# EAGLE board SparkFun_ProMicro-RP2040-Panel (EAGLE 9.6.2), part 1 of 9
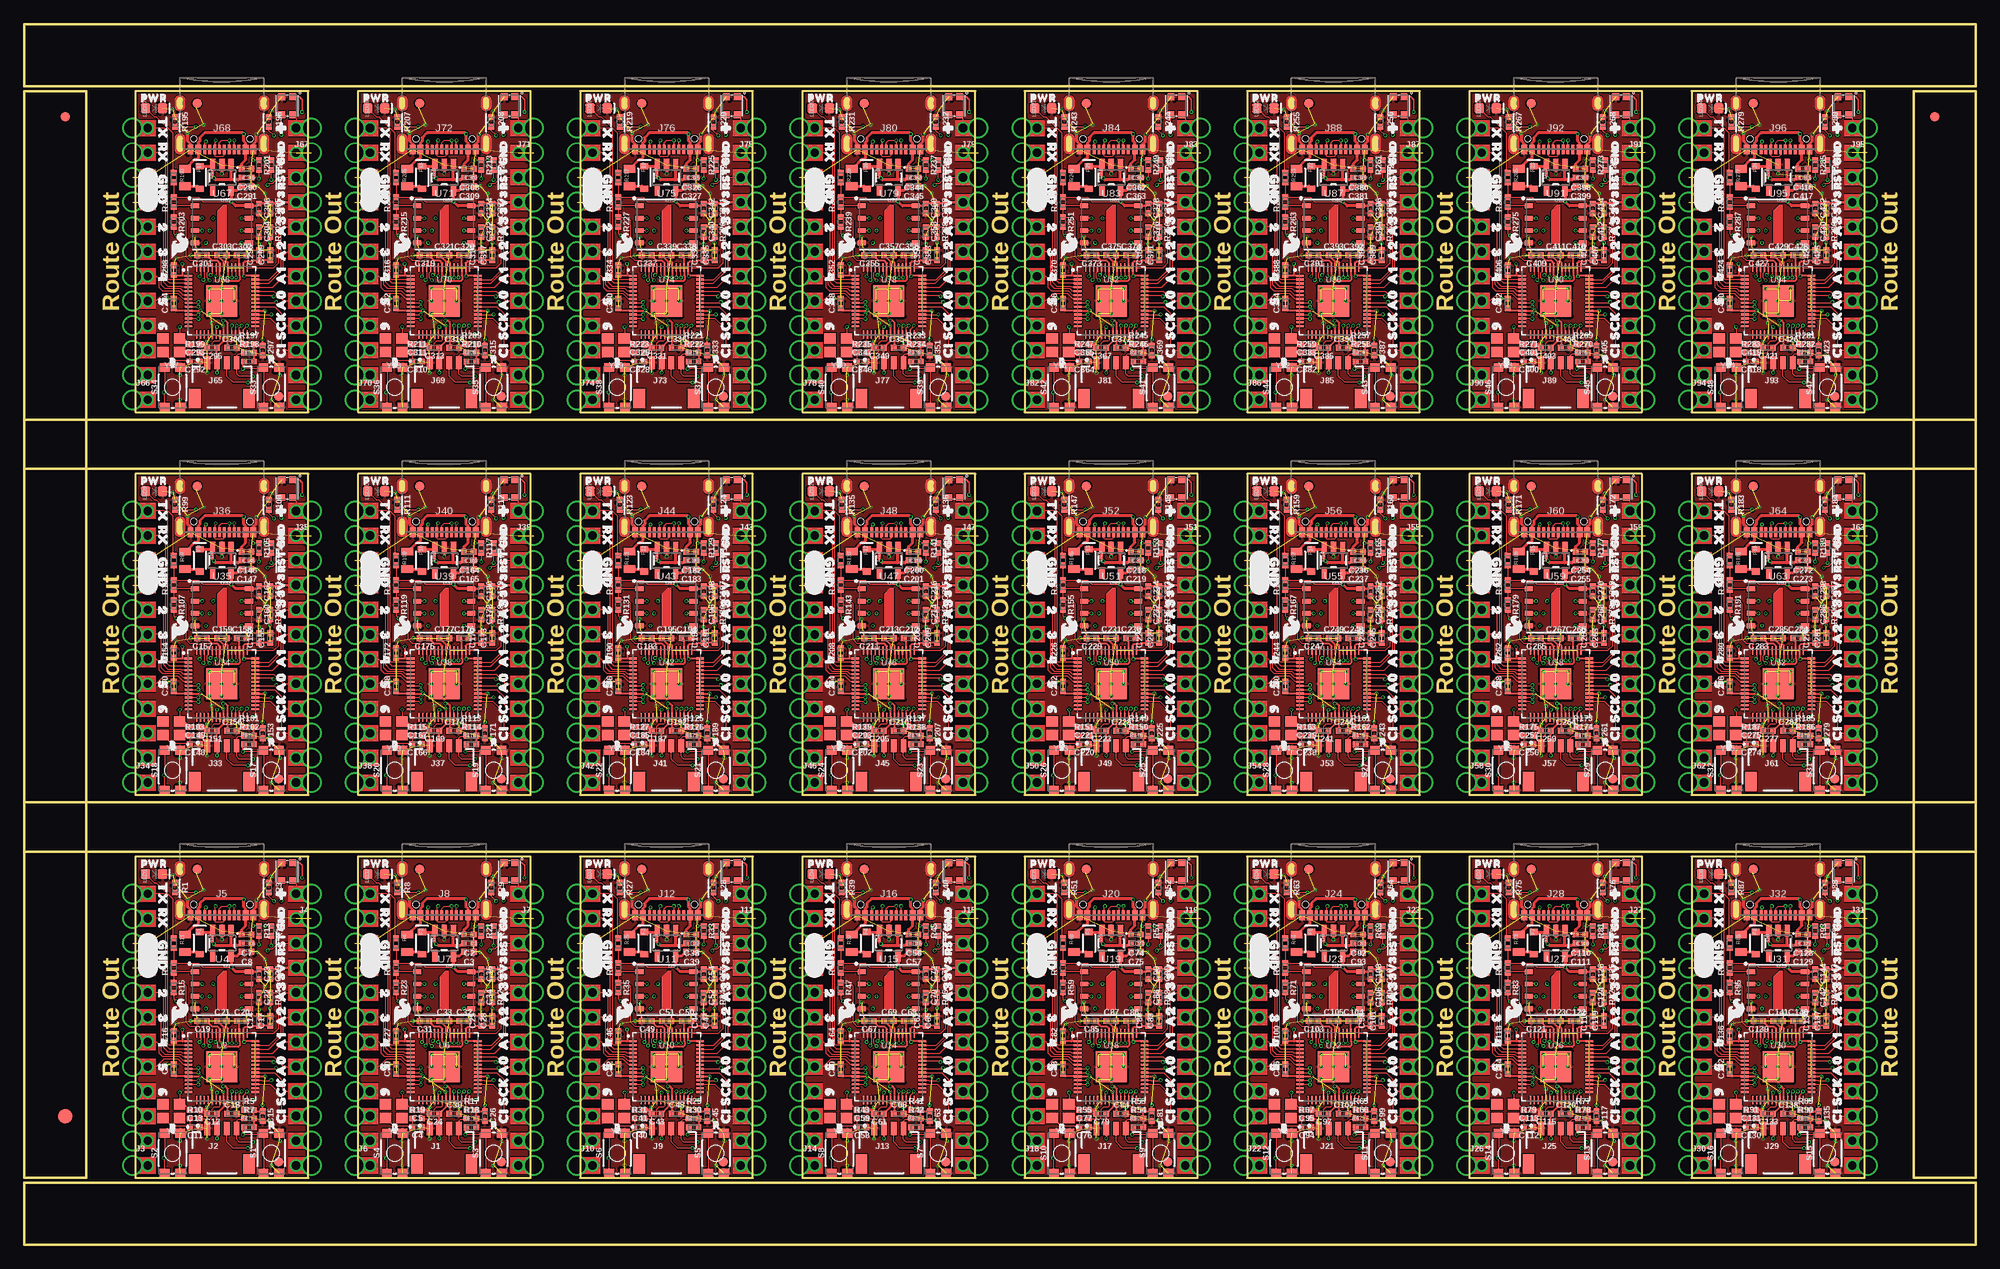
[diagram p0: board, top side]
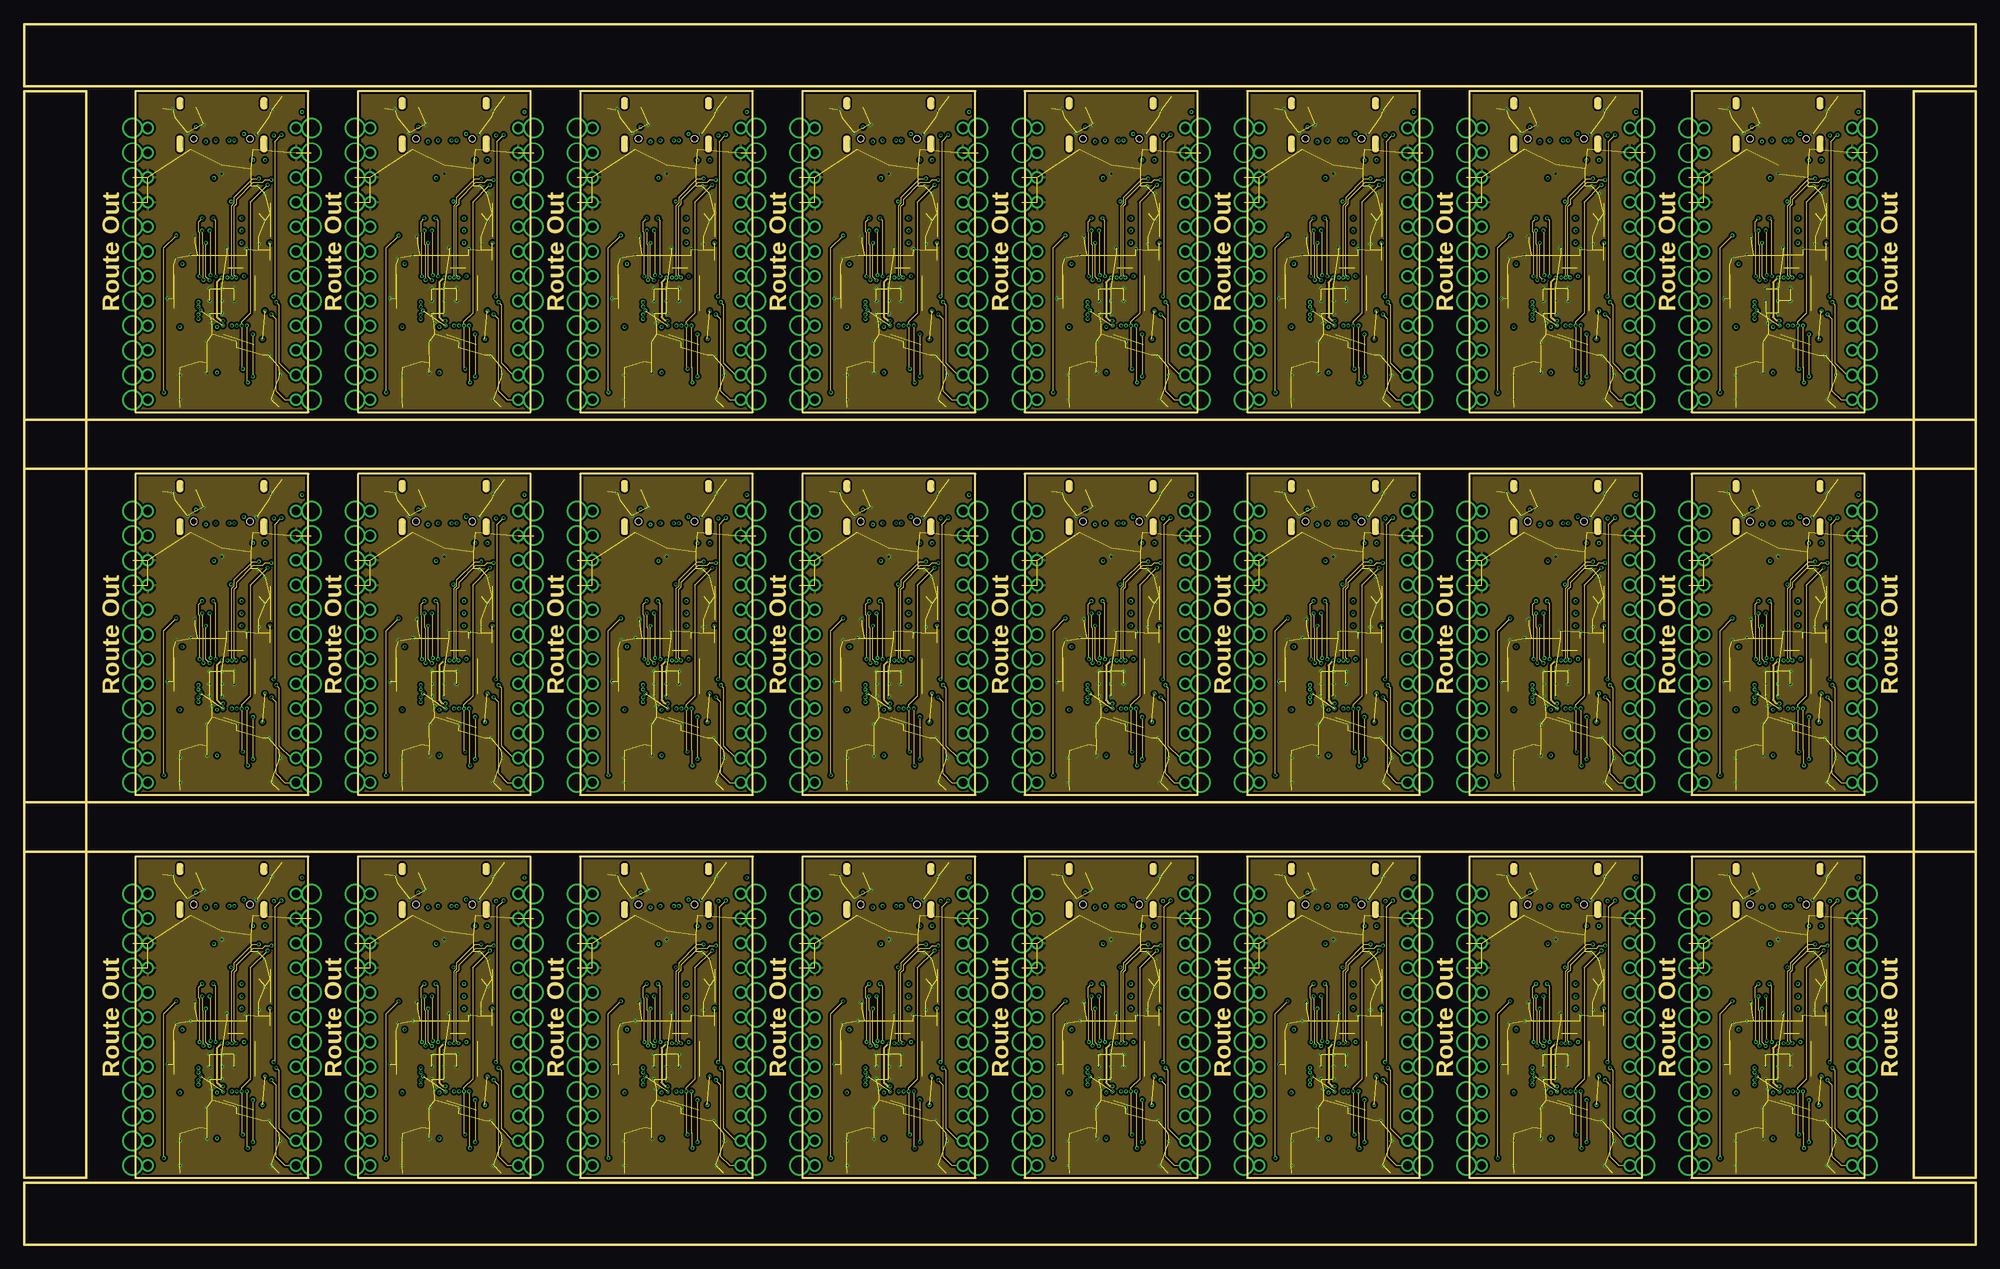
[diagram p1: board, inner layer Route2]
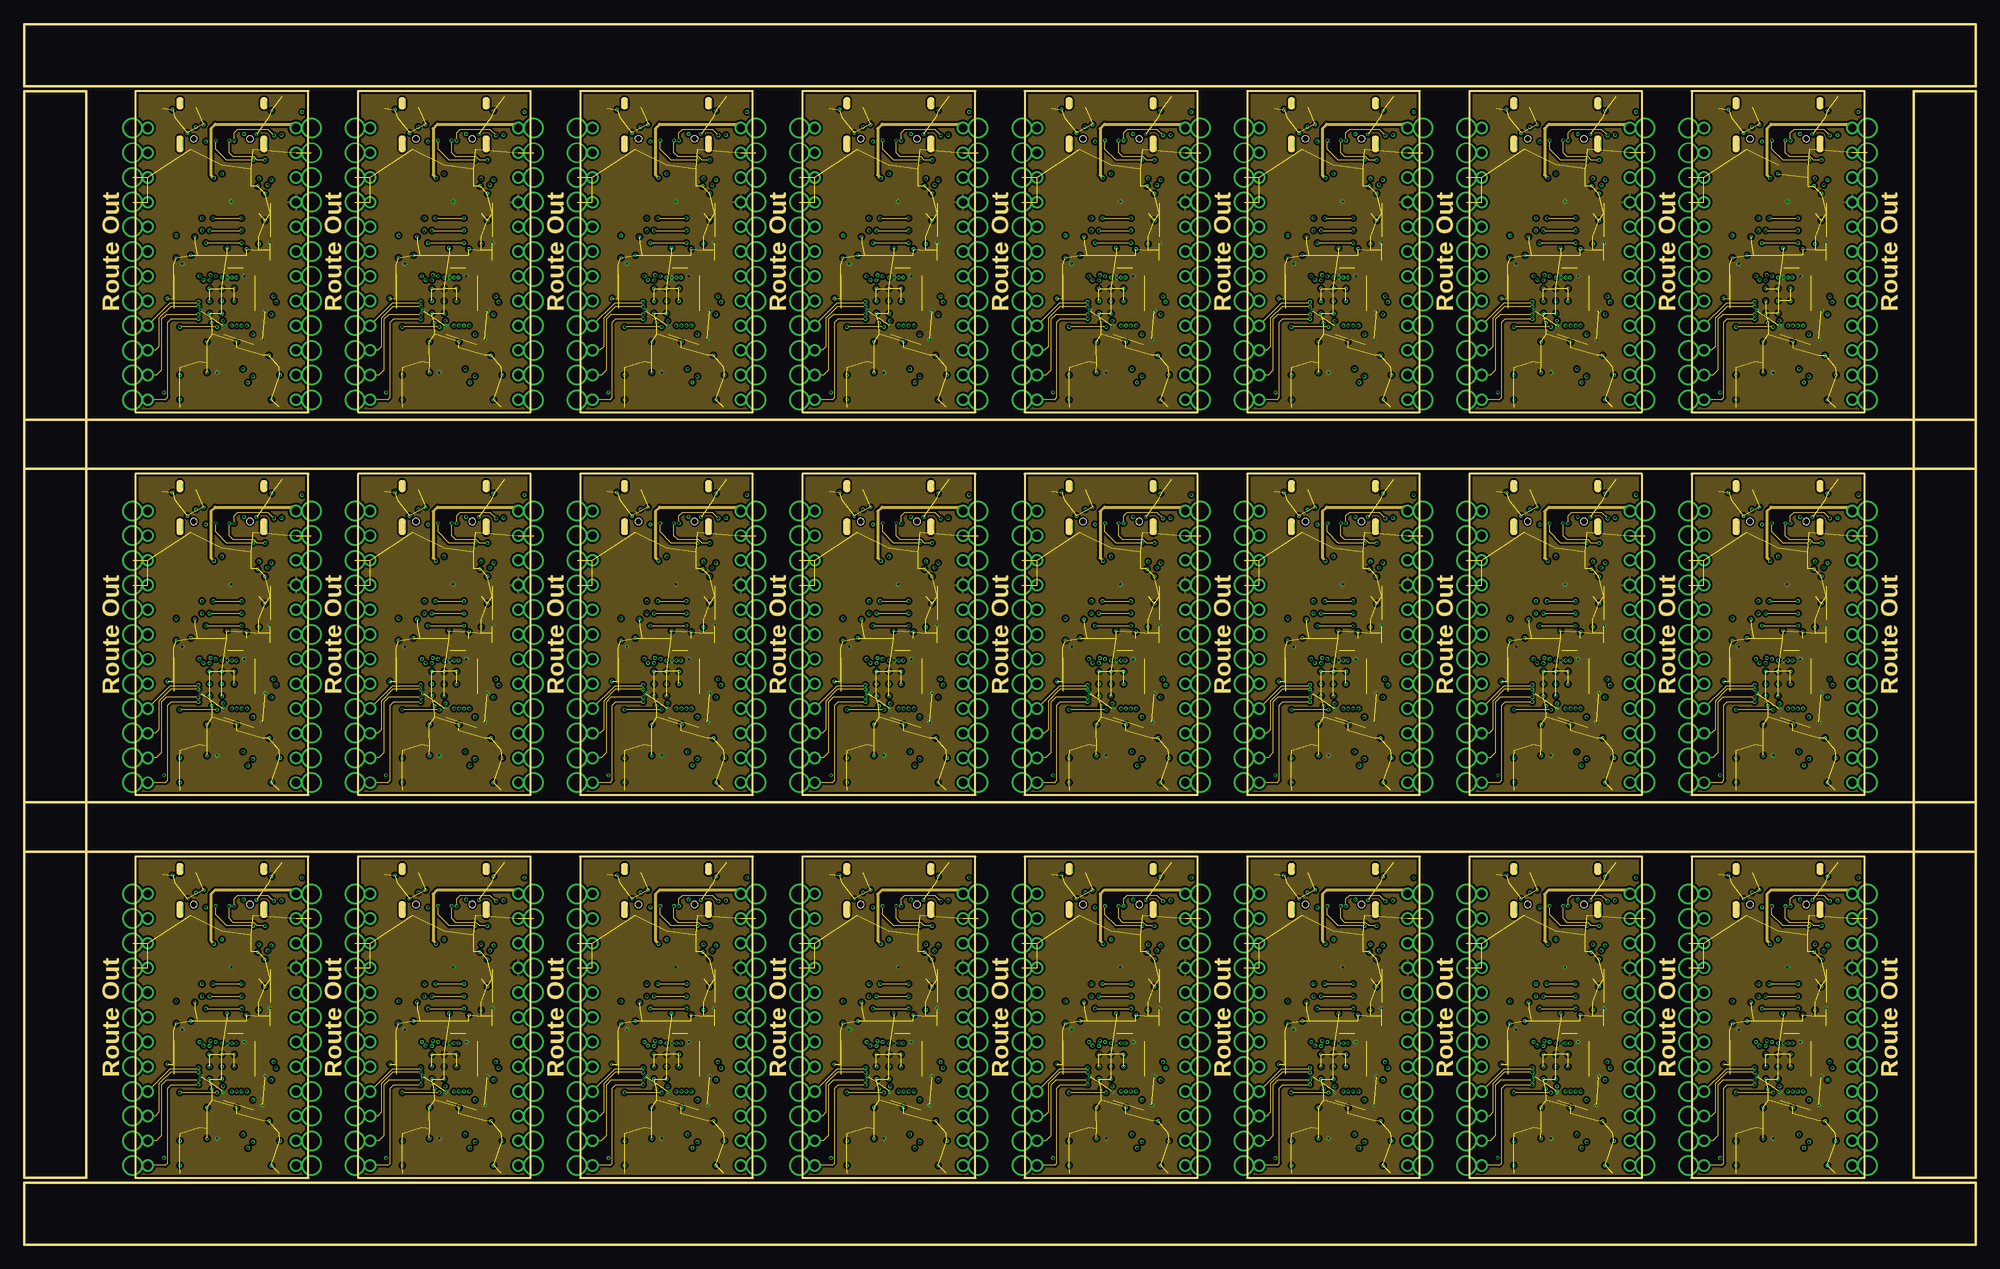
[diagram p2: board, inner layer Route15]
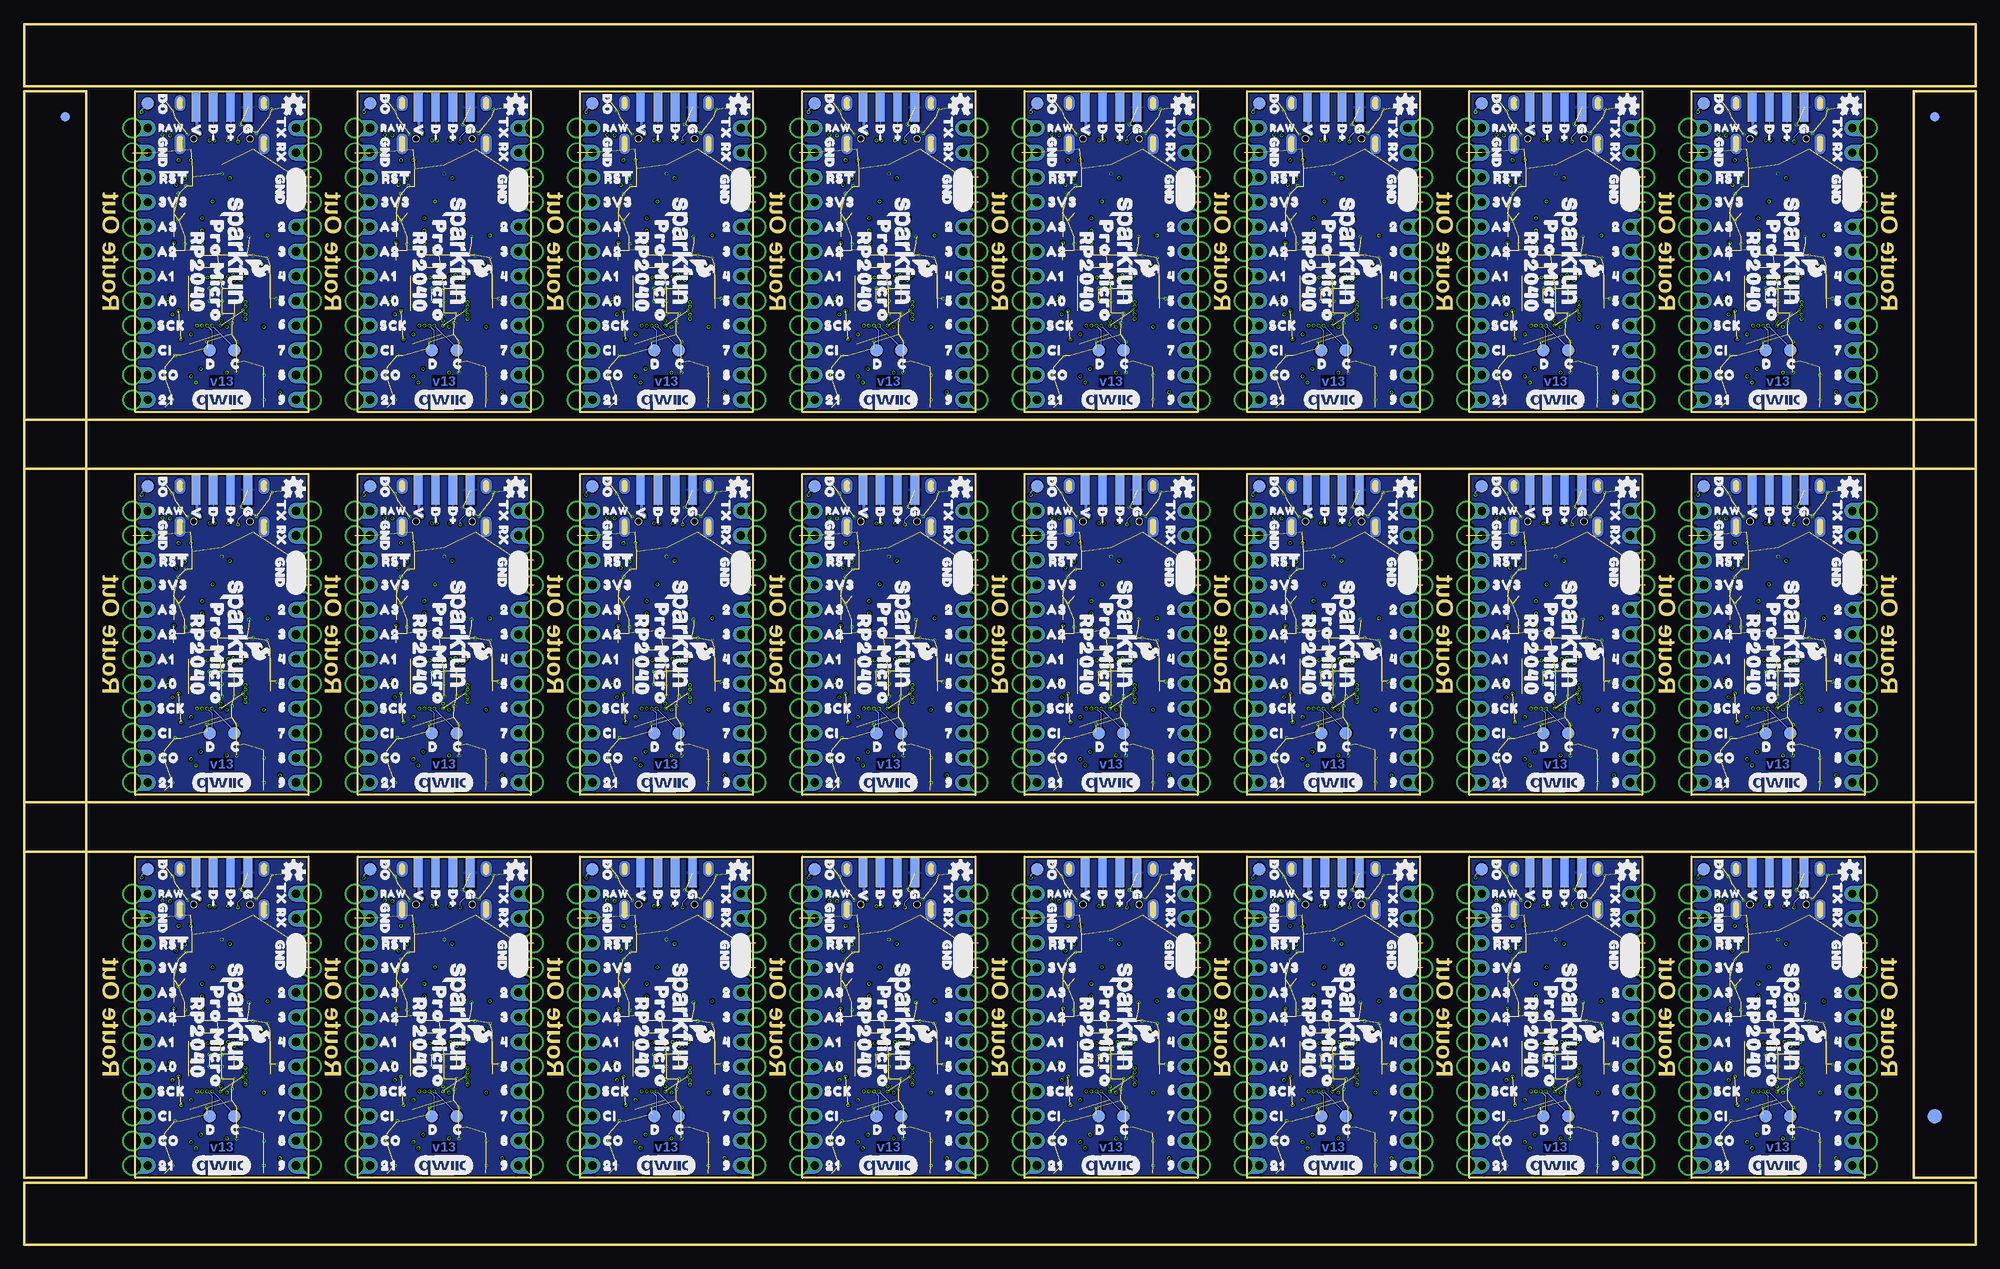
[diagram p3: board, bottom side, seen from below]

Size 200.66 x 125.48 mm. Coordinates in mm from the lower left corner, seen from the top.
Outline: 200.66,84.84 200.66,118.62 194.31,118.62 194.31,6.86 200.66,6.86 200.66,40.39
Outline: 200.66,84.84 200.66,79.76
Outline: 200.66,79.76 200.66,45.47
Outline: 200.66,45.47 200.66,40.39
Outline: 0,40.39 0,6.86 6.35,6.86 6.35,118.62 0,118.62 0,84.84
Outline: 0,40.39 0,45.47
Outline: 0,45.47 0,79.76
Outline: 0,79.76 0,84.84
Outline: 0,84.84 200.66,84.84
Outline: 200.66,79.76 0,79.76
Outline: 0,45.47 200.66,45.47
Outline: 200.66,40.39 0,40.39
Outline: 11.43,39.88 11.43,6.86 29.21,6.86 29.21,39.88 11.43,39.88
Outline: 34.29,39.88 34.29,6.86 52.07,6.86 52.07,39.88 34.29,39.88
Outline: 57.15,39.88 57.15,6.86 74.93,6.86 74.93,39.88 57.15,39.88
Outline: 80.01,39.88 80.01,6.86 97.79,6.86 97.79,39.88 80.01,39.88
Outline: 102.87,39.88 102.87,6.86 120.65,6.86 120.65,39.88 102.87,39.88
Outline: 125.73,39.88 125.73,6.86 143.51,6.86 143.51,39.88 125.73,39.88
Outline: 148.59,39.88 148.59,6.86 166.37,6.86 166.37,39.88 148.59,39.88
Outline: 171.45,39.88 171.45,6.86 189.23,6.86 189.23,39.88 171.45,39.88
Outline: 11.43,79.25 11.43,46.23 29.21,46.23 29.21,79.25 11.43,79.25
Outline: 34.29,79.25 34.29,46.23 52.07,46.23 52.07,79.25 34.29,79.25
Outline: 57.15,79.25 57.15,46.23 74.93,46.23 74.93,79.25 57.15,79.25
Outline: 80.01,79.25 80.01,46.23 97.79,46.23 97.79,79.25 80.01,79.25
Outline: 102.87,79.25 102.87,46.23 120.65,46.23 120.65,79.25 102.87,79.25
Outline: 125.73,79.25 125.73,46.23 143.51,46.23 143.51,79.25 125.73,79.25
Outline: 148.59,79.25 148.59,46.23 166.37,46.23 166.37,79.25 148.59,79.25
Outline: 171.45,79.25 171.45,46.23 189.23,46.23 189.23,79.25 171.45,79.25
Outline: 11.43,118.62 11.43,85.6 29.21,85.6 29.21,118.62 11.43,118.62
Outline: 34.29,118.62 34.29,85.6 52.07,85.6 52.07,118.62 34.29,118.62
Outline: 57.15,118.62 57.15,85.6 74.93,85.6 74.93,118.62 57.15,118.62
Outline: 80.01,118.62 80.01,85.6 97.79,85.6 97.79,118.62 80.01,118.62
Outline: 102.87,118.62 102.87,85.6 120.65,85.6 120.65,118.62 102.87,118.62
Outline: 125.73,118.62 125.73,85.6 143.51,85.6 143.51,118.62 125.73,118.62
Outline: 148.59,118.62 148.59,85.6 166.37,85.6 166.37,118.62 148.59,118.62
Outline: 171.45,118.62 171.45,85.6 189.23,85.6 189.23,118.62 171.45,118.62
Outline: 0,6.35 200.66,6.35 200.66,0 0,0 0,6.35
Outline: 0,125.48 200.66,125.48 200.66,119.13 0,119.13 0,125.48
Copper layers (1+2*15+16): Top 0.035mm / dielectric 1.5mm / Route2 0.035mm / dielectric 0.15mm / Route15 0.035mm / dielectric 0.2mm / Bottom 0.035mm
Design rules "SparkFun_ProMicro-RP2040": minimum track width 4mil, minimum drill 0.2mm, track to track 4mil, track to pad 4mil, pad to pad 4mil, via to via 4mil, smd to smd 4mil, copper to edge 6mil, drill to drill 6mil, minimum pad ring 3mil, minimum via ring 3mil, stop-mask expansion 4mil, vias tented up to drill 25mil, thermal gap 10mil
Net classes: 1 Power: width 0.127 mm, clearance 0.178 mm

## Footprints (pad centres in the part's own frame; a part is rotated, then mirrored left to right if it is on the bottom)
0402-TIGHT = smd 0.6 x 0.6: 1 -0.5,0; 2 0.5,0
SOD-323 = smd 0.63 x 0.83: A 1.15,0; C -1.15,0
FIDUCIAL-1X2 = smd 1 x 1: 1 0,0
FIDUCIAL-1.5X3 = smd 1.5 x 1.5: 1 0,0
0805 = smd 0.8 x 1.2: 1 -0.9,0; 2 0.9,0
JST04_1MM_RA = smd 0.6 x 1.35: 1 -1.5,0; 2 -0.5,0; 3 0.5,0; 4 1.5,0 | smd 1.2 x 2: NC1 2.8,-3.675; NC2 -2.8,-3.675
1X12_CASTELLATED = drill 0.85 pad 1.016: 1 0,0; 2 0,2.54; 3 0,5.08; 4 0,7.62; 5 0,10.16; 6 0,12.7; 7 0,15.24; 8 0,17.78; 9 0,20.32; 10 0,22.86; 11 0,25.4; 12 0,27.94 | drill 1.7 pad 1.75: 1B -1.57,0; 2B -1.57,2.54; 3B -1.57,5.08; 4B -1.57,7.62; 5B -1.57,10.16; 6B -1.57,12.7; 7B -1.57,15.24; 8B -1.57,17.78; 9B -1.57,20.32; 10B -1.57,22.86; 11B -1.57,25.4; 12B -1.57,27.94
USB-C-16P_4LAYER-PADS = smd 0.3 x 1: A5 -1.25,-0.34; A6 -0.25,-0.34; A7 0.25,-0.34; A8 1.25,-0.34; B5 1.75,-0.34; B6 0.75,-0.34; B7 -0.75,-0.34; B8 -1.75,-0.34 | smd 0.6 x 1: GND -3.225,-0.34; GND2 3.225,-0.34; VBUS1 -2.45,-0.34; VBUS2 2.45,-0.34 | drill 0.4 pad 0.6 long: SHLD1 -4.318,-0.915; SHLD2 4.318,-0.915; SHLD3 -4.318,-5.095; SHLD4 4.318,-5.095 | hole 0.65: -2.89,-1.445; 2.89,-1.445
USB-SOLDER-PADS = smd 3 x 0.9: D+ 0,-0.889; D- 0,0.889; GND 0,-2.667; VBUS 0,2.667
LED-0603 = smd 1 x 1: A -0.877,0; C 0.877,0
TACTILE_SWITCH_SMD_4.6X2.8MM = smd 0.9 x 1: 1 -2.05,-0.8; 2 2.05,-0.8; 3 2.05,0.8; 4 -2.05,0.8
PAD.03X.05 = smd 1.27 x 1.27: P$1 0,0
SOT23-5 = smd 0.55 x 1.2: 1 -0.95,-1.3; 2 0,-1.3; 3 0.95,-1.3; 4 0.95,1.3; 5 -0.95,1.3
QFN-56 = smd 0.875 x 0.2: 1 -3.437,2.6; 2 -3.437,2.2; 3 -3.437,1.8; 4 -3.437,1.4; 5 -3.437,1; 6 -3.437,0.6; 7 -3.437,0.2; 8 -3.437,-0.2; 9 -3.437,-0.6; 10 -3.437,-1; 11 -3.437,-1.4; 12 -3.437,-1.8; 13 -3.437,-2.2; 14 -3.437,-2.6; 29 3.437,-2.6; 30 3.437,-2.2; 31 3.437,-1.8; 32 3.437,-1.4; 33 3.437,-1; 34 3.437,-0.6; 35 3.437,-0.2; 36 3.437,0.2; 37 3.437,0.6; 38 3.437,1; 39 3.437,1.4; 40 3.437,1.8; 41 3.437,2.2; 42 3.437,2.6 | smd 0.2 x 0.875: 15 -2.6,-3.437; 16 -2.2,-3.437; 17 -1.8,-3.437; 18 -1.4,-3.437; 19 -1,-3.437; 20 -0.6,-3.437; 21 -0.2,-3.437; 22 0.2,-3.437; 23 0.6,-3.437; 24 1,-3.437; 25 1.4,-3.437; 26 1.8,-3.437; 27 2.2,-3.437; 28 2.6,-3.437; 43 2.6,3.437; 44 2.2,3.437; 45 1.8,3.437; 46 1.4,3.437; 47 1,3.437; 48 0.6,3.437; 49 0.2,3.437; 50 -0.2,3.437; 51 -0.6,3.437; 52 -1,3.437; 53 -1.4,3.437; 54 -1.8,3.437; 55 -2.2,3.437; 56 -2.6,3.437 | smd 3.2 x 3.2: EPAD 0,0
WS2812-2020 = smd 0.7 x 0.7: 1 0.915,-0.55; 2 0.915,0.55; 3 -0.915,0.55; 4 -0.915,-0.55
WSON-8-6X5-SKINNY_CENTERPAD = smd 0.85 x 0.5: 1 -2.775,1.905; 2 -2.775,0.635; 3 -2.775,-0.635; 4 -2.775,-1.905; 5 2.775,-1.905; 6 2.775,-0.635; 7 2.775,0.635; 8 2.775,1.905
CRYSTAL-SMD-2X2.5MM = smd 1.2 x 1.1: P1 0.846,0.69; P2 -0.854,0.69; P3 -0.854,-0.71; P4 0.846,-0.71

## Placement (x,y rotation side)
C1  1.0uF  [0402-TIGHT]  45.72,31.88 180 top
C2  10uF  [0402-TIGHT]  45.72,30.99 180 top
C3  10uF  [0402-TIGHT]  45.72,30.1 180 top
C4  15pF  [0402-TIGHT]  40.39,12.06 180 top
C5  15pF  [0402-TIGHT]  40.39,13.84 180 top
C6  1.0uF  [0402-TIGHT]  22.86,31.88 180 top
C7  10uF  [0402-TIGHT]  22.86,30.99 180 top
C8  10uF  [0402-TIGHT]  22.86,30.1 180 top
C9  0.1uF  [0402-TIGHT]  15.37,18.03 90 top
C10  0.1uF  [0402-TIGHT]  38.23,18.03 90 top
C11  15pF  [0402-TIGHT]  17.53,12.06 180 top
C12  0.1uF  [0402-TIGHT]  19.3,13.46 180 top
C13  15pF  [0402-TIGHT]  17.53,13.84 180 top
C14  0.1uF  [0402-TIGHT]  24.13,22.99 90 top
C15  0.1uF  [0402-TIGHT]  24.51,13.21 270 top
C16  0.1uF  [0402-TIGHT]  15.37,21.46 90 top
C17  0.1uF  [0402-TIGHT]  25.27,22.99 90 top
C18  0.1uF  [0402-TIGHT]  21.34,13.46 0 top
C19  0.1uF  [0402-TIGHT]  18.29,22.99 180 top
C20  2.2uF  [0402-TIGHT]  22.35,22.99 0 top
C21  2.2uF  [0402-TIGHT]  20.32,22.99 0 top
C22  2.2uF  [0402-TIGHT]  24.13,25.4 270 top
C23  2.2uF  [0402-TIGHT]  24.13,27.81 270 top
C24  0.1uF  [0402-TIGHT]  42.16,13.46 180 top
C25  0.1uF  [0402-TIGHT]  46.99,22.99 90 top
C26  0.1uF  [0402-TIGHT]  47.37,13.21 270 top
C27  0.1uF  [0402-TIGHT]  38.23,21.46 90 top
C28  0.1uF  [0402-TIGHT]  48.13,22.99 90 top
C29  0.1uF  [0402-TIGHT]  25.27,27.81 270 top
C30  0.1uF  [0402-TIGHT]  44.2,13.46 0 top
C31  0.1uF  [0402-TIGHT]  41.15,22.99 180 top
C32  2.2uF  [0402-TIGHT]  45.21,22.99 0 top
C33  2.2uF  [0402-TIGHT]  43.18,22.99 0 top
C34  2.2uF  [0402-TIGHT]  46.99,25.4 270 top
C35  0.1uF  [0402-TIGHT]  48.13,27.81 270 top
C36  2.2uF  [0402-TIGHT]  46.99,27.81 270 top
C37  1.0uF  [0402-TIGHT]  68.58,31.88 180 top
C38  10uF  [0402-TIGHT]  68.58,30.99 180 top
C39  10uF  [0402-TIGHT]  68.58,30.1 180 top
C40  15pF  [0402-TIGHT]  63.25,12.06 180 top
C41  15pF  [0402-TIGHT]  63.25,13.84 180 top
C42  0.1uF  [0402-TIGHT]  61.09,18.03 90 top
C43  0.1uF  [0402-TIGHT]  65.02,13.46 180 top
C44  0.1uF  [0402-TIGHT]  69.85,22.99 90 top
C45  0.1uF  [0402-TIGHT]  70.23,13.21 270 top
C46  0.1uF  [0402-TIGHT]  61.09,21.46 90 top
C47  0.1uF  [0402-TIGHT]  70.99,22.99 90 top
C48  0.1uF  [0402-TIGHT]  67.06,13.46 0 top
C49  0.1uF  [0402-TIGHT]  64.01,22.99 180 top
C50  2.2uF  [0402-TIGHT]  68.07,22.99 0 top
C51  2.2uF  [0402-TIGHT]  66.04,22.99 0 top
C52  2.2uF  [0402-TIGHT]  69.85,25.4 270 top
C53  0.1uF  [0402-TIGHT]  70.99,27.81 270 top
C54  2.2uF  [0402-TIGHT]  69.85,27.81 270 top
C55  1.0uF  [0402-TIGHT]  91.44,31.88 180 top
C56  10uF  [0402-TIGHT]  91.44,30.99 180 top
C57  10uF  [0402-TIGHT]  91.44,30.1 180 top
C58  15pF  [0402-TIGHT]  86.11,12.06 180 top
C59  15pF  [0402-TIGHT]  86.11,13.84 180 top
C60  0.1uF  [0402-TIGHT]  83.95,18.03 90 top
C61  0.1uF  [0402-TIGHT]  87.88,13.46 180 top
C62  0.1uF  [0402-TIGHT]  92.71,22.99 90 top
C63  0.1uF  [0402-TIGHT]  93.09,13.21 270 top
C64  0.1uF  [0402-TIGHT]  83.95,21.46 90 top
C65  0.1uF  [0402-TIGHT]  93.85,22.99 90 top
C66  0.1uF  [0402-TIGHT]  89.92,13.46 0 top
C67  0.1uF  [0402-TIGHT]  86.87,22.99 180 top
C68  2.2uF  [0402-TIGHT]  90.93,22.99 0 top
C69  2.2uF  [0402-TIGHT]  88.9,22.99 0 top
C70  2.2uF  [0402-TIGHT]  92.71,25.4 270 top
C71  0.1uF  [0402-TIGHT]  93.85,27.81 270 top
C72  2.2uF  [0402-TIGHT]  92.71,27.81 270 top
C73  1.0uF  [0402-TIGHT]  114.3,31.88 180 top
C74  10uF  [0402-TIGHT]  114.3,30.99 180 top
C75  10uF  [0402-TIGHT]  114.3,30.1 180 top
C76  15pF  [0402-TIGHT]  108.97,12.06 180 top
C77  15pF  [0402-TIGHT]  108.97,13.84 180 top
C78  0.1uF  [0402-TIGHT]  106.81,18.03 90 top
C79  0.1uF  [0402-TIGHT]  110.74,13.46 180 top
C80  0.1uF  [0402-TIGHT]  115.57,22.99 90 top
C81  0.1uF  [0402-TIGHT]  115.95,13.21 270 top
C82  0.1uF  [0402-TIGHT]  106.81,21.46 90 top
C83  0.1uF  [0402-TIGHT]  116.71,22.99 90 top
C84  0.1uF  [0402-TIGHT]  112.78,13.46 0 top
C85  0.1uF  [0402-TIGHT]  109.73,22.99 180 top
C86  2.2uF  [0402-TIGHT]  113.79,22.99 0 top
C87  2.2uF  [0402-TIGHT]  111.76,22.99 0 top
C88  2.2uF  [0402-TIGHT]  115.57,25.4 270 top
C89  0.1uF  [0402-TIGHT]  116.71,27.81 270 top
C90  2.2uF  [0402-TIGHT]  115.57,27.81 270 top
C91  1.0uF  [0402-TIGHT]  137.16,31.88 180 top
C92  10uF  [0402-TIGHT]  137.16,30.99 180 top
C93  10uF  [0402-TIGHT]  137.16,30.1 180 top
C94  15pF  [0402-TIGHT]  131.83,12.06 180 top
C95  15pF  [0402-TIGHT]  131.83,13.84 180 top
C96  0.1uF  [0402-TIGHT]  129.67,18.03 90 top
C97  0.1uF  [0402-TIGHT]  133.6,13.46 180 top
C98  0.1uF  [0402-TIGHT]  138.43,22.99 90 top
C99  0.1uF  [0402-TIGHT]  138.81,13.21 270 top
C100  0.1uF  [0402-TIGHT]  129.67,21.46 90 top
C101  0.1uF  [0402-TIGHT]  139.57,22.99 90 top
C102  0.1uF  [0402-TIGHT]  135.64,13.46 0 top
C103  0.1uF  [0402-TIGHT]  132.59,22.99 180 top
C104  2.2uF  [0402-TIGHT]  136.65,22.99 0 top
C105  2.2uF  [0402-TIGHT]  134.62,22.99 0 top
C106  2.2uF  [0402-TIGHT]  138.43,25.4 270 top
C107  0.1uF  [0402-TIGHT]  139.57,27.81 270 top
C108  2.2uF  [0402-TIGHT]  138.43,27.81 270 top
C109  1.0uF  [0402-TIGHT]  160.02,31.88 180 top
C110  10uF  [0402-TIGHT]  160.02,30.99 180 top
C111  10uF  [0402-TIGHT]  160.02,30.1 180 top
C112  15pF  [0402-TIGHT]  154.69,12.06 180 top
C113  15pF  [0402-TIGHT]  154.69,13.84 180 top
C114  0.1uF  [0402-TIGHT]  152.53,18.03 90 top
C115  0.1uF  [0402-TIGHT]  156.46,13.46 180 top
C116  0.1uF  [0402-TIGHT]  161.29,22.99 90 top
C117  0.1uF  [0402-TIGHT]  161.67,13.21 270 top
C118  0.1uF  [0402-TIGHT]  152.53,21.46 90 top
C119  0.1uF  [0402-TIGHT]  162.43,22.99 90 top
C120  0.1uF  [0402-TIGHT]  158.5,13.46 0 top
C121  0.1uF  [0402-TIGHT]  155.45,22.99 180 top
C122  2.2uF  [0402-TIGHT]  159.51,22.99 0 top
C123  2.2uF  [0402-TIGHT]  157.48,22.99 0 top
C124  2.2uF  [0402-TIGHT]  161.29,25.4 270 top
C125  0.1uF  [0402-TIGHT]  162.43,27.81 270 top
C126  2.2uF  [0402-TIGHT]  161.29,27.81 270 top
C127  1.0uF  [0402-TIGHT]  182.88,31.88 180 top
C128  10uF  [0402-TIGHT]  182.88,30.99 180 top
C129  10uF  [0402-TIGHT]  182.88,30.1 180 top
C130  15pF  [0402-TIGHT]  177.55,12.06 180 top
C131  15pF  [0402-TIGHT]  177.55,13.84 180 top
C132  0.1uF  [0402-TIGHT]  175.39,18.03 90 top
C133  0.1uF  [0402-TIGHT]  179.32,13.46 180 top
C134  0.1uF  [0402-TIGHT]  184.15,22.99 90 top
C135  0.1uF  [0402-TIGHT]  184.53,13.21 270 top
C136  0.1uF  [0402-TIGHT]  175.39,21.46 90 top
C137  0.1uF  [0402-TIGHT]  185.29,22.99 90 top
C138  0.1uF  [0402-TIGHT]  181.36,13.46 0 top
C139  0.1uF  [0402-TIGHT]  178.31,22.99 180 top
C140  2.2uF  [0402-TIGHT]  182.37,22.99 0 top
C141  2.2uF  [0402-TIGHT]  180.34,22.99 0 top
C142  2.2uF  [0402-TIGHT]  184.15,25.4 270 top
C143  0.1uF  [0402-TIGHT]  185.29,27.81 270 top
C144  2.2uF  [0402-TIGHT]  184.15,27.81 270 top
C145  1.0uF  [0402-TIGHT]  22.86,71.25 180 top
C146  10uF  [0402-TIGHT]  22.86,70.36 180 top
C147  10uF  [0402-TIGHT]  22.86,69.47 180 top
C148  15pF  [0402-TIGHT]  17.53,51.43 180 top
C149  15pF  [0402-TIGHT]  17.53,53.21 180 top
C150  0.1uF  [0402-TIGHT]  15.37,57.4 90 top
C151  0.1uF  [0402-TIGHT]  19.3,52.83 180 top
C152  0.1uF  [0402-TIGHT]  24.13,62.36 90 top
C153  0.1uF  [0402-TIGHT]  24.51,52.58 270 top
C154  0.1uF  [0402-TIGHT]  15.37,60.83 90 top
C155  0.1uF  [0402-TIGHT]  25.27,62.36 90 top
C156  0.1uF  [0402-TIGHT]  21.34,52.83 0 top
C157  0.1uF  [0402-TIGHT]  18.29,62.36 180 top
C158  2.2uF  [0402-TIGHT]  22.35,62.36 0 top
C159  2.2uF  [0402-TIGHT]  20.32,62.36 0 top
C160  2.2uF  [0402-TIGHT]  24.13,64.77 270 top
C161  0.1uF  [0402-TIGHT]  25.27,67.18 270 top
C162  2.2uF  [0402-TIGHT]  24.13,67.18 270 top
C163  1.0uF  [0402-TIGHT]  45.72,71.25 180 top
C164  10uF  [0402-TIGHT]  45.72,70.36 180 top
C165  10uF  [0402-TIGHT]  45.72,69.47 180 top
C166  15pF  [0402-TIGHT]  40.39,51.43 180 top
C167  15pF  [0402-TIGHT]  40.39,53.21 180 top
C168  0.1uF  [0402-TIGHT]  38.23,57.4 90 top
C169  0.1uF  [0402-TIGHT]  42.16,52.83 180 top
C170  0.1uF  [0402-TIGHT]  46.99,62.36 90 top
C171  0.1uF  [0402-TIGHT]  47.37,52.58 270 top
C172  0.1uF  [0402-TIGHT]  38.23,60.83 90 top
C173  0.1uF  [0402-TIGHT]  48.13,62.36 90 top
C174  0.1uF  [0402-TIGHT]  44.2,52.83 0 top
C175  0.1uF  [0402-TIGHT]  41.15,62.36 180 top
C176  2.2uF  [0402-TIGHT]  45.21,62.36 0 top
C177  2.2uF  [0402-TIGHT]  43.18,62.36 0 top
C178  2.2uF  [0402-TIGHT]  46.99,64.77 270 top
C179  0.1uF  [0402-TIGHT]  48.13,67.18 270 top
C180  2.2uF  [0402-TIGHT]  46.99,67.18 270 top
C181  1.0uF  [0402-TIGHT]  68.58,71.25 180 top
C182  10uF  [0402-TIGHT]  68.58,70.36 180 top
C183  10uF  [0402-TIGHT]  68.58,69.47 180 top
C184  15pF  [0402-TIGHT]  63.25,51.43 180 top
C185  15pF  [0402-TIGHT]  63.25,53.21 180 top
C186  0.1uF  [0402-TIGHT]  61.09,57.4 90 top
C187  0.1uF  [0402-TIGHT]  65.02,52.83 180 top
C188  0.1uF  [0402-TIGHT]  69.85,62.36 90 top
C189  0.1uF  [0402-TIGHT]  70.23,52.58 270 top
C190  0.1uF  [0402-TIGHT]  61.09,60.83 90 top
C191  0.1uF  [0402-TIGHT]  70.99,62.36 90 top
C192  0.1uF  [0402-TIGHT]  67.06,52.83 0 top
C193  0.1uF  [0402-TIGHT]  64.01,62.36 180 top
C194  2.2uF  [0402-TIGHT]  68.07,62.36 0 top
C195  2.2uF  [0402-TIGHT]  66.04,62.36 0 top
C196  2.2uF  [0402-TIGHT]  69.85,64.77 270 top
C197  0.1uF  [0402-TIGHT]  70.99,67.18 270 top
C198  2.2uF  [0402-TIGHT]  69.85,67.18 270 top
C199  1.0uF  [0402-TIGHT]  91.44,71.25 180 top
C200  10uF  [0402-TIGHT]  91.44,70.36 180 top
C201  10uF  [0402-TIGHT]  91.44,69.47 180 top
C202  15pF  [0402-TIGHT]  86.11,51.43 180 top
C203  15pF  [0402-TIGHT]  86.11,53.21 180 top
C204  0.1uF  [0402-TIGHT]  83.95,57.4 90 top
C205  0.1uF  [0402-TIGHT]  87.88,52.83 180 top
C206  0.1uF  [0402-TIGHT]  92.71,62.36 90 top
C207  0.1uF  [0402-TIGHT]  93.09,52.58 270 top
C208  0.1uF  [0402-TIGHT]  83.95,60.83 90 top
C209  0.1uF  [0402-TIGHT]  93.85,62.36 90 top
C210  0.1uF  [0402-TIGHT]  89.92,52.83 0 top
C211  0.1uF  [0402-TIGHT]  86.87,62.36 180 top
C212  2.2uF  [0402-TIGHT]  90.93,62.36 0 top
C213  2.2uF  [0402-TIGHT]  88.9,62.36 0 top
C214  2.2uF  [0402-TIGHT]  92.71,64.77 270 top
C215  0.1uF  [0402-TIGHT]  93.85,67.18 270 top
C216  2.2uF  [0402-TIGHT]  92.71,67.18 270 top
C217  1.0uF  [0402-TIGHT]  114.3,71.25 180 top
C218  10uF  [0402-TIGHT]  114.3,70.36 180 top
C219  10uF  [0402-TIGHT]  114.3,69.47 180 top
C220  15pF  [0402-TIGHT]  108.97,51.43 180 top
C221  15pF  [0402-TIGHT]  108.97,53.21 180 top
C222  0.1uF  [0402-TIGHT]  106.81,57.4 90 top
C223  0.1uF  [0402-TIGHT]  110.74,52.83 180 top
C224  0.1uF  [0402-TIGHT]  115.57,62.36 90 top
C225  0.1uF  [0402-TIGHT]  115.95,52.58 270 top
C226  0.1uF  [0402-TIGHT]  106.81,60.83 90 top
C227  0.1uF  [0402-TIGHT]  116.71,62.36 90 top
C228  0.1uF  [0402-TIGHT]  112.78,52.83 0 top
C229  0.1uF  [0402-TIGHT]  109.73,62.36 180 top
C230  2.2uF  [0402-TIGHT]  113.79,62.36 0 top
C231  2.2uF  [0402-TIGHT]  111.76,62.36 0 top
C232  2.2uF  [0402-TIGHT]  115.57,64.77 270 top
C233  0.1uF  [0402-TIGHT]  116.71,67.18 270 top
C234  2.2uF  [0402-TIGHT]  115.57,67.18 270 top
C235  1.0uF  [0402-TIGHT]  137.16,71.25 180 top
C236  10uF  [0402-TIGHT]  137.16,70.36 180 top
C237  10uF  [0402-TIGHT]  137.16,69.47 180 top
C238  15pF  [0402-TIGHT]  131.83,51.43 180 top
C239  15pF  [0402-TIGHT]  131.83,53.21 180 top
C240  0.1uF  [0402-TIGHT]  129.67,57.4 90 top
C241  0.1uF  [0402-TIGHT]  133.6,52.83 180 top
C242  0.1uF  [0402-TIGHT]  138.43,62.36 90 top
C243  0.1uF  [0402-TIGHT]  138.81,52.58 270 top
C244  0.1uF  [0402-TIGHT]  129.67,60.83 90 top
C245  0.1uF  [0402-TIGHT]  139.57,62.36 90 top
C246  0.1uF  [0402-TIGHT]  135.64,52.83 0 top
C247  0.1uF  [0402-TIGHT]  132.59,62.36 180 top
C248  2.2uF  [0402-TIGHT]  136.65,62.36 0 top
C249  2.2uF  [0402-TIGHT]  134.62,62.36 0 top
C250  2.2uF  [0402-TIGHT]  138.43,64.77 270 top
C251  0.1uF  [0402-TIGHT]  139.57,67.18 270 top
C252  2.2uF  [0402-TIGHT]  138.43,67.18 270 top
C253  1.0uF  [0402-TIGHT]  160.02,71.25 180 top
C254  10uF  [0402-TIGHT]  160.02,70.36 180 top
C255  10uF  [0402-TIGHT]  160.02,69.47 180 top
C256  15pF  [0402-TIGHT]  154.69,51.43 180 top
C257  15pF  [0402-TIGHT]  154.69,53.21 180 top
C258  0.1uF  [0402-TIGHT]  152.53,57.4 90 top
C259  0.1uF  [0402-TIGHT]  156.46,52.83 180 top
C260  0.1uF  [0402-TIGHT]  161.29,62.36 90 top
C261  0.1uF  [0402-TIGHT]  161.67,52.58 270 top
C262  0.1uF  [0402-TIGHT]  152.53,60.83 90 top
C263  0.1uF  [0402-TIGHT]  162.43,62.36 90 top
C264  0.1uF  [0402-TIGHT]  158.5,52.83 0 top
C265  0.1uF  [0402-TIGHT]  155.45,62.36 180 top
C266  2.2uF  [0402-TIGHT]  159.51,62.36 0 top
C267  2.2uF  [0402-TIGHT]  157.48,62.36 0 top
C268  2.2uF  [0402-TIGHT]  161.29,64.77 270 top
C269  0.1uF  [0402-TIGHT]  162.43,67.18 270 top
C270  2.2uF  [0402-TIGHT]  161.29,67.18 270 top
C271  1.0uF  [0402-TIGHT]  182.88,71.25 180 top
C272  10uF  [0402-TIGHT]  182.88,70.36 180 top
C273  10uF  [0402-TIGHT]  182.88,69.47 180 top
C274  15pF  [0402-TIGHT]  177.55,51.43 180 top
C275  15pF  [0402-TIGHT]  177.55,53.21 180 top
C276  0.1uF  [0402-TIGHT]  175.39,57.4 90 top
C277  0.1uF  [0402-TIGHT]  179.32,52.83 180 top
C278  0.1uF  [0402-TIGHT]  184.15,62.36 90 top
C279  0.1uF  [0402-TIGHT]  184.53,52.58 270 top
C280  0.1uF  [0402-TIGHT]  175.39,60.83 90 top
C281  0.1uF  [0402-TIGHT]  185.29,62.36 90 top
C282  0.1uF  [0402-TIGHT]  181.36,52.83 0 top
C283  0.1uF  [0402-TIGHT]  178.31,62.36 180 top
C284  2.2uF  [0402-TIGHT]  182.37,62.36 0 top
C285  2.2uF  [0402-TIGHT]  180.34,62.36 0 top
C286  2.2uF  [0402-TIGHT]  184.15,64.77 270 top
C287  0.1uF  [0402-TIGHT]  185.29,67.18 270 top
C288  2.2uF  [0402-TIGHT]  184.15,67.18 270 top
C289  1.0uF  [0402-TIGHT]  22.86,110.62 180 top
C290  10uF  [0402-TIGHT]  22.86,109.73 180 top
C291  10uF  [0402-TIGHT]  22.86,108.84 180 top
C292  15pF  [0402-TIGHT]  17.53,90.81 180 top
C293  15pF  [0402-TIGHT]  17.53,92.58 180 top
C294  0.1uF  [0402-TIGHT]  15.37,96.77 90 top
C295  0.1uF  [0402-TIGHT]  19.3,92.2 180 top
C296  0.1uF  [0402-TIGHT]  24.13,101.73 90 top
C297  0.1uF  [0402-TIGHT]  24.51,91.95 270 top
C298  0.1uF  [0402-TIGHT]  15.37,100.2 90 top
C299  0.1uF  [0402-TIGHT]  25.27,101.73 90 top
C300  0.1uF  [0402-TIGHT]  21.34,92.2 0 top
C301  0.1uF  [0402-TIGHT]  18.29,101.73 180 top
C302  2.2uF  [0402-TIGHT]  22.35,101.73 0 top
C303  2.2uF  [0402-TIGHT]  20.32,101.73 0 top
C304  2.2uF  [0402-TIGHT]  24.13,104.14 270 top
C305  0.1uF  [0402-TIGHT]  25.27,106.55 270 top
C306  2.2uF  [0402-TIGHT]  24.13,106.55 270 top
C307  1.0uF  [0402-TIGHT]  45.72,110.62 180 top
C308  10uF  [0402-TIGHT]  45.72,109.73 180 top
C309  10uF  [0402-TIGHT]  45.72,108.84 180 top
C310  15pF  [0402-TIGHT]  40.39,90.81 180 top
C311  15pF  [0402-TIGHT]  40.39,92.58 180 top
C312  0.1uF  [0402-TIGHT]  38.23,96.77 90 top
C313  0.1uF  [0402-TIGHT]  42.16,92.2 180 top
C314  0.1uF  [0402-TIGHT]  46.99,101.73 90 top
C315  0.1uF  [0402-TIGHT]  47.37,91.95 270 top
C316  0.1uF  [0402-TIGHT]  38.23,100.2 90 top
C317  0.1uF  [0402-TIGHT]  48.13,101.73 90 top
C318  0.1uF  [0402-TIGHT]  44.2,92.2 0 top
C319  0.1uF  [0402-TIGHT]  41.15,101.73 180 top
C320  2.2uF  [0402-TIGHT]  45.21,101.73 0 top
C321  2.2uF  [0402-TIGHT]  43.18,101.73 0 top
C322  2.2uF  [0402-TIGHT]  46.99,104.14 270 top
C323  0.1uF  [0402-TIGHT]  48.13,106.55 270 top
C324  2.2uF  [0402-TIGHT]  46.99,106.55 270 top
C325  1.0uF  [0402-TIGHT]  68.58,110.62 180 top
C326  10uF  [0402-TIGHT]  68.58,109.73 180 top
C327  10uF  [0402-TIGHT]  68.58,108.84 180 top
C328  15pF  [0402-TIGHT]  63.25,90.81 180 top
C329  15pF  [0402-TIGHT]  63.25,92.58 180 top
C330  0.1uF  [0402-TIGHT]  61.09,96.77 90 top
C331  0.1uF  [0402-TIGHT]  65.02,92.2 180 top
C332  0.1uF  [0402-TIGHT]  69.85,101.73 90 top
C333  0.1uF  [0402-TIGHT]  70.23,91.95 270 top
C334  0.1uF  [0402-TIGHT]  61.09,100.2 90 top
C335  0.1uF  [0402-TIGHT]  70.99,101.73 90 top
C336  0.1uF  [0402-TIGHT]  67.06,92.2 0 top
C337  0.1uF  [0402-TIGHT]  64.01,101.73 180 top
C338  2.2uF  [0402-TIGHT]  68.07,101.73 0 top
C339  2.2uF  [0402-TIGHT]  66.04,101.73 0 top
C340  2.2uF  [0402-TIGHT]  69.85,104.14 270 top
C341  0.1uF  [0402-TIGHT]  70.99,106.55 270 top
C342  2.2uF  [0402-TIGHT]  69.85,106.55 270 top
C343  1.0uF  [0402-TIGHT]  91.44,110.62 180 top
C344  10uF  [0402-TIGHT]  91.44,109.73 180 top
C345  10uF  [0402-TIGHT]  91.44,108.84 180 top
C346  15pF  [0402-TIGHT]  86.11,90.81 180 top
C347  15pF  [0402-TIGHT]  86.11,92.58 180 top
C348  0.1uF  [0402-TIGHT]  83.95,96.77 90 top
C349  0.1uF  [0402-TIGHT]  87.88,92.2 180 top
C350  0.1uF  [0402-TIGHT]  92.71,101.73 90 top
C351  0.1uF  [0402-TIGHT]  93.09,91.95 270 top
C352  0.1uF  [0402-TIGHT]  83.95,100.2 90 top
C353  0.1uF  [0402-TIGHT]  93.85,101.73 90 top
C354  0.1uF  [0402-TIGHT]  89.92,92.2 0 top
C355  0.1uF  [0402-TIGHT]  86.87,101.73 180 top
C356  2.2uF  [0402-TIGHT]  90.93,101.73 0 top
C357  2.2uF  [0402-TIGHT]  88.9,101.73 0 top
C358  2.2uF  [0402-TIGHT]  92.71,104.14 270 top
C359  0.1uF  [0402-TIGHT]  93.85,106.55 270 top
C360  2.2uF  [0402-TIGHT]  92.71,106.55 270 top
C361  1.0uF  [0402-TIGHT]  114.3,110.62 180 top
C362  10uF  [0402-TIGHT]  114.3,109.73 180 top
C363  10uF  [0402-TIGHT]  114.3,108.84 180 top
C364  15pF  [0402-TIGHT]  108.97,90.81 180 top
C365  15pF  [0402-TIGHT]  108.97,92.58 180 top
C366  0.1uF  [0402-TIGHT]  106.81,96.77 90 top
C367  0.1uF  [0402-TIGHT]  110.74,92.2 180 top
C368  0.1uF  [0402-TIGHT]  115.57,101.73 90 top
C369  0.1uF  [0402-TIGHT]  115.95,91.95 270 top
C370  0.1uF  [0402-TIGHT]  106.81,100.2 90 top
C371  0.1uF  [0402-TIGHT]  116.71,101.73 90 top
C372  0.1uF  [0402-TIGHT]  112.78,92.2 0 top
C373  0.1uF  [0402-TIGHT]  109.73,101.73 180 top
C374  2.2uF  [0402-TIGHT]  113.79,101.73 0 top
C375  2.2uF  [0402-TIGHT]  111.76,101.73 0 top
C376  2.2uF  [0402-TIGHT]  115.57,104.14 270 top
C377  0.1uF  [0402-TIGHT]  116.71,106.55 270 top
C378  2.2uF  [0402-TIGHT]  115.57,106.55 270 top
C379  1.0uF  [0402-TIGHT]  137.16,110.62 180 top
C380  10uF  [0402-TIGHT]  137.16,109.73 180 top
C381  10uF  [0402-TIGHT]  137.16,108.84 180 top
C382  15pF  [0402-TIGHT]  131.83,90.81 180 top
C383  15pF  [0402-TIGHT]  131.83,92.58 180 top
C384  0.1uF  [0402-TIGHT]  129.67,96.77 90 top
C385  0.1uF  [0402-TIGHT]  133.6,92.2 180 top
C386  0.1uF  [0402-TIGHT]  138.43,101.73 90 top
C387  0.1uF  [0402-TIGHT]  138.81,91.95 270 top
C388  0.1uF  [0402-TIGHT]  129.67,100.2 90 top
C389  0.1uF  [0402-TIGHT]  139.57,101.73 90 top
C390  0.1uF  [0402-TIGHT]  135.64,92.2 0 top
C391  0.1uF  [0402-TIGHT]  132.59,101.73 180 top
C392  2.2uF  [0402-TIGHT]  136.65,101.73 0 top
C393  2.2uF  [0402-TIGHT]  134.62,101.73 0 top
C394  2.2uF  [0402-TIGHT]  138.43,104.14 270 top
C395  0.1uF  [0402-TIGHT]  139.57,106.55 270 top
C396  2.2uF  [0402-TIGHT]  138.43,106.55 270 top
C397  1.0uF  [0402-TIGHT]  160.02,110.62 180 top
C398  10uF  [0402-TIGHT]  160.02,109.73 180 top
C399  10uF  [0402-TIGHT]  160.02,108.84 180 top
C400  15pF  [0402-TIGHT]  154.69,90.81 180 top
C401  15pF  [0402-TIGHT]  154.69,92.58 180 top
C402  0.1uF  [0402-TIGHT]  152.53,96.77 90 top
C403  0.1uF  [0402-TIGHT]  156.46,92.2 180 top
C404  0.1uF  [0402-TIGHT]  161.29,101.73 90 top
C405  0.1uF  [0402-TIGHT]  161.67,91.95 270 top
C406  0.1uF  [0402-TIGHT]  152.53,100.2 90 top
C407  0.1uF  [0402-TIGHT]  162.43,101.73 90 top
C408  0.1uF  [0402-TIGHT]  158.5,92.2 0 top
C409  0.1uF  [0402-TIGHT]  155.45,101.73 180 top
C410  2.2uF  [0402-TIGHT]  159.51,101.73 0 top
C411  2.2uF  [0402-TIGHT]  157.48,101.73 0 top
C412  2.2uF  [0402-TIGHT]  161.29,104.14 270 top
C413  0.1uF  [0402-TIGHT]  162.43,106.55 270 top
C414  2.2uF  [0402-TIGHT]  161.29,106.55 270 top
C415  1.0uF  [0402-TIGHT]  182.88,110.62 180 top
C416  10uF  [0402-TIGHT]  182.88,109.73 180 top
C417  10uF  [0402-TIGHT]  182.88,108.84 180 top
C418  15pF  [0402-TIGHT]  177.55,90.81 180 top
C419  15pF  [0402-TIGHT]  177.55,92.58 180 top
C420  0.1uF  [0402-TIGHT]  175.39,96.77 90 top
C421  0.1uF  [0402-TIGHT]  179.32,92.2 180 top
C422  0.1uF  [0402-TIGHT]  184.15,101.73 90 top
C423  0.1uF  [0402-TIGHT]  184.53,91.95 270 top
C424  0.1uF  [0402-TIGHT]  175.39,100.2 90 top
C425  0.1uF  [0402-TIGHT]  185.29,101.73 90 top
C426  0.1uF  [0402-TIGHT]  181.36,92.2 0 top
C427  0.1uF  [0402-TIGHT]  178.31,101.73 180 top
C428  2.2uF  [0402-TIGHT]  182.37,101.73 0 top
C429  2.2uF  [0402-TIGHT]  180.34,101.73 0 top
C430  2.2uF  [0402-TIGHT]  184.15,104.14 270 top
C431  0.1uF  [0402-TIGHT]  185.29,106.55 270 top
C432  2.2uF  [0402-TIGHT]  184.15,106.55 270 top
D1  3A/10V/280mV  [SOD-323]  40.89,30.99 270 top
D2  3A/10V/280mV  [SOD-323]  18.03,30.99 270 top
D3  3A/10V/280mV  [SOD-323]  63.75,30.99 270 top
D4  3A/10V/280mV  [SOD-323]  86.61,30.99 270 top
D5  3A/10V/280mV  [SOD-323]  109.47,30.99 270 top
D6  3A/10V/280mV  [SOD-323]  132.33,30.99 270 top
D7  3A/10V/280mV  [SOD-323]  155.19,30.99 270 top
D8  3A/10V/280mV  [SOD-323]  178.05,30.99 270 top
D9  3A/10V/280mV  [SOD-323]  18.03,70.36 270 top
D10  3A/10V/280mV  [SOD-323]  40.89,70.36 270 top
D11  3A/10V/280mV  [SOD-323]  63.75,70.36 270 top
D12  3A/10V/280mV  [SOD-323]  86.61,70.36 270 top
D13  3A/10V/280mV  [SOD-323]  109.47,70.36 270 top
D14  3A/10V/280mV  [SOD-323]  132.33,70.36 270 top
D15  3A/10V/280mV  [SOD-323]  155.19,70.36 270 top
D16  3A/10V/280mV  [SOD-323]  178.05,70.36 270 top
D17  3A/10V/280mV  [SOD-323]  18.03,109.73 270 top
D18  3A/10V/280mV  [SOD-323]  40.89,109.73 270 top
D19  3A/10V/280mV  [SOD-323]  63.75,109.73 270 top
D20  3A/10V/280mV  [SOD-323]  86.61,109.73 270 top
D21  3A/10V/280mV  [SOD-323]  109.47,109.73 270 top
D22  3A/10V/280mV  [SOD-323]  132.33,109.73 270 top
D23  3A/10V/280mV  [SOD-323]  155.19,109.73 270 top
D24  3A/10V/280mV  [SOD-323]  178.05,109.73 270 top
E$1  [FIDUCIAL-1X2]  4.23,115.95 0 top
E$2  [FIDUCIAL-1X2]  4.23,115.95 0 bottom
E$3  [FIDUCIAL-1X2]  196.43,115.95 0 top
E$4  [FIDUCIAL-1X2]  196.43,115.95 0 bottom
E$5  [FIDUCIAL-1.5X3]  4.23,13.21 0 top
E$6  [FIDUCIAL-1.5X3]  4.23,13.21 0 bottom
F1  6V 0.5A  [0805]  16.51,30.99 270 top
F2  6V 0.5A  [0805]  39.37,30.99 270 top
F3  6V 0.5A  [0805]  62.23,30.99 270 top
F4  6V 0.5A  [0805]  85.09,30.99 270 top
F5  6V 0.5A  [0805]  107.95,30.99 270 top
F6  6V 0.5A  [0805]  130.81,30.99 270 top
F7  6V 0.5A  [0805]  153.67,30.99 270 top
F8  6V 0.5A  [0805]  176.53,30.99 270 top
F9  6V 0.5A  [0805]  16.51,70.36 270 top
F10  6V 0.5A  [0805]  39.37,70.36 270 top
F11  6V 0.5A  [0805]  62.23,70.36 270 top
F12  6V 0.5A  [0805]  85.09,70.36 270 top
F13  6V 0.5A  [0805]  107.95,70.36 270 top
F14  6V 0.5A  [0805]  130.81,70.36 270 top
F15  6V 0.5A  [0805]  153.67,70.36 270 top
F16  6V 0.5A  [0805]  176.53,70.36 270 top
F17  6V 0.5A  [0805]  16.51,109.73 270 top
F18  6V 0.5A  [0805]  39.37,109.73 270 top
F19  6V 0.5A  [0805]  62.23,109.73 270 top
F20  6V 0.5A  [0805]  85.09,109.73 270 top
F21  6V 0.5A  [0805]  107.95,109.73 270 top
F22  6V 0.5A  [0805]  130.81,109.73 270 top
F23  6V 0.5A  [0805]  153.67,109.73 270 top
F24  6V 0.5A  [0805]  176.53,109.73 270 top
J1  Qwiic  [JST04_1MM_RA]  43.18,11.94 0 top
J2  Qwiic  [JST04_1MM_RA]  20.32,11.94 0 top
J3  [1X12_CASTELLATED]  12.7,8.13 0 top
J4  [1X12_CASTELLATED]  27.94,36.07 180 top
J5  USB Female Type C Connector  [USB-C-16P_4LAYER-PADS]  20.32,33.53 180 top
J6  [1X12_CASTELLATED]  35.56,8.13 0 top
J7  [1X12_CASTELLATED]  50.8,36.07 180 top
J8  USB Female Type C Connector  [USB-C-16P_4LAYER-PADS]  43.18,33.53 180 top
J9  Qwiic  [JST04_1MM_RA]  66.04,11.94 0 top
J10  [1X12_CASTELLATED]  58.42,8.13 0 top
J11  [1X12_CASTELLATED]  73.66,36.07 180 top
J12  USB Female Type C Connector  [USB-C-16P_4LAYER-PADS]  66.04,33.53 180 top
J13  Qwiic  [JST04_1MM_RA]  88.9,11.94 0 top
J14  [1X12_CASTELLATED]  81.28,8.13 0 top
J15  [1X12_CASTELLATED]  96.52,36.07 180 top
J16  USB Female Type C Connector  [USB-C-16P_4LAYER-PADS]  88.9,33.53 180 top
J17  Qwiic  [JST04_1MM_RA]  111.76,11.94 0 top
J18  [1X12_CASTELLATED]  104.14,8.13 0 top
J19  [1X12_CASTELLATED]  119.38,36.07 180 top
J20  USB Female Type C Connector  [USB-C-16P_4LAYER-PADS]  111.76,33.53 180 top
J21  Qwiic  [JST04_1MM_RA]  134.62,11.94 0 top
J22  [1X12_CASTELLATED]  127,8.13 0 top
J23  [1X12_CASTELLATED]  142.24,36.07 180 top
J24  USB Female Type C Connector  [USB-C-16P_4LAYER-PADS]  134.62,33.53 180 top
J25  Qwiic  [JST04_1MM_RA]  157.48,11.94 0 top
J26  [1X12_CASTELLATED]  149.86,8.13 0 top
J27  [1X12_CASTELLATED]  165.1,36.07 180 top
J28  USB Female Type C Connector  [USB-C-16P_4LAYER-PADS]  157.48,33.53 180 top
J29  Qwiic  [JST04_1MM_RA]  180.34,11.94 0 top
J30  [1X12_CASTELLATED]  172.72,8.13 0 top
J31  [1X12_CASTELLATED]  187.96,36.07 180 top
J32  USB Female Type C Connector  [USB-C-16P_4LAYER-PADS]  180.34,33.53 180 top
J33  Qwiic  [JST04_1MM_RA]  20.32,51.31 0 top
J34  [1X12_CASTELLATED]  12.7,47.5 0 top
J35  [1X12_CASTELLATED]  27.94,75.44 180 top
J36  USB Female Type C Connector  [USB-C-16P_4LAYER-PADS]  20.32,72.9 180 top
J37  Qwiic  [JST04_1MM_RA]  43.18,51.31 0 top
J38  [1X12_CASTELLATED]  35.56,47.5 0 top
J39  [1X12_CASTELLATED]  50.8,75.44 180 top
J40  USB Female Type C Connector  [USB-C-16P_4LAYER-PADS]  43.18,72.9 180 top
J41  Qwiic  [JST04_1MM_RA]  66.04,51.31 0 top
J42  [1X12_CASTELLATED]  58.42,47.5 0 top
J43  [1X12_CASTELLATED]  73.66,75.44 180 top
J44  USB Female Type C Connector  [USB-C-16P_4LAYER-PADS]  66.04,72.9 180 top
J45  Qwiic  [JST04_1MM_RA]  88.9,51.31 0 top
J46  [1X12_CASTELLATED]  81.28,47.5 0 top
J47  [1X12_CASTELLATED]  96.52,75.44 180 top
J48  USB Female Type C Connector  [USB-C-16P_4LAYER-PADS]  88.9,72.9 180 top
J49  Qwiic  [JST04_1MM_RA]  111.76,51.31 0 top
J50  [1X12_CASTELLATED]  104.14,47.5 0 top
J51  [1X12_CASTELLATED]  119.38,75.44 180 top
J52  USB Female Type C Connector  [USB-C-16P_4LAYER-PADS]  111.76,72.9 180 top
J53  Qwiic  [JST04_1MM_RA]  134.62,51.31 0 top
J54  [1X12_CASTELLATED]  127,47.5 0 top
J55  [1X12_CASTELLATED]  142.24,75.44 180 top
J56  USB Female Type C Connector  [USB-C-16P_4LAYER-PADS]  134.62,72.9 180 top
J57  Qwiic  [JST04_1MM_RA]  157.48,51.31 0 top
J58  [1X12_CASTELLATED]  149.86,47.5 0 top
J59  [1X12_CASTELLATED]  165.1,75.44 180 top
J60  USB Female Type C Connector  [USB-C-16P_4LAYER-PADS]  157.48,72.9 180 top
J61  Qwiic  [JST04_1MM_RA]  180.34,51.31 0 top
J62  [1X12_CASTELLATED]  172.72,47.5 0 top
J63  [1X12_CASTELLATED]  187.96,75.44 180 top
J64  USB Female Type C Connector  [USB-C-16P_4LAYER-PADS]  180.34,72.9 180 top
J65  Qwiic  [JST04_1MM_RA]  20.32,90.68 0 top
J66  [1X12_CASTELLATED]  12.7,86.87 0 top
J67  [1X12_CASTELLATED]  27.94,114.81 180 top
J68  USB Female Type C Connector  [USB-C-16P_4LAYER-PADS]  20.32,112.27 180 top
J69  Qwiic  [JST04_1MM_RA]  43.18,90.68 0 top
J70  [1X12_CASTELLATED]  35.56,86.87 0 top
J71  [1X12_CASTELLATED]  50.8,114.81 180 top
J72  USB Female Type C Connector  [USB-C-16P_4LAYER-PADS]  43.18,112.27 180 top
J73  Qwiic  [JST04_1MM_RA]  66.04,90.68 0 top
J74  [1X12_CASTELLATED]  58.42,86.87 0 top
J75  [1X12_CASTELLATED]  73.66,114.81 180 top
J76  USB Female Type C Connector  [USB-C-16P_4LAYER-PADS]  66.04,112.27 180 top
J77  Qwiic  [JST04_1MM_RA]  88.9,90.68 0 top
J78  [1X12_CASTELLATED]  81.28,86.87 0 top
J79  [1X12_CASTELLATED]  96.52,114.81 180 top
J80  USB Female Type C Connector  [USB-C-16P_4LAYER-PADS]  88.9,112.27 180 top
J81  Qwiic  [JST04_1MM_RA]  111.76,90.68 0 top
J82  [1X12_CASTELLATED]  104.14,86.87 0 top
J83  [1X12_CASTELLATED]  119.38,114.81 180 top
J84  USB Female Type C Connector  [USB-C-16P_4LAYER-PADS]  111.76,112.27 180 top
J85  Qwiic  [JST04_1MM_RA]  134.62,90.68 0 top
J86  [1X12_CASTELLATED]  127,86.87 0 top
J87  [1X12_CASTELLATED]  142.24,114.81 180 top
J88  USB Female Type C Connector  [USB-C-16P_4LAYER-PADS]  134.62,112.27 180 top
J89  Qwiic  [JST04_1MM_RA]  157.48,90.68 0 top
J90  [1X12_CASTELLATED]  149.86,86.87 0 top
J91  [1X12_CASTELLATED]  165.1,114.81 180 top
J92  USB Female Type C Connector  [USB-C-16P_4LAYER-PADS]  157.48,112.27 180 top
J93  Qwiic  [JST04_1MM_RA]  180.34,90.68 0 top
J94  [1X12_CASTELLATED]  172.72,86.87 0 top
J95  [1X12_CASTELLATED]  187.96,114.81 180 top
J96  USB Female Type C Connector  [USB-C-16P_4LAYER-PADS]  180.34,112.27 180 top
JP1  FIDUCIAL1X2  [FIDUCIAL-1X2]  26.16,8.51 0 top
JP2  FIDUCIAL1X2  [FIDUCIAL-1X2]  17.78,38.61 0 top
JP3  FIDUCIAL1X2  [FIDUCIAL-1X2]  49.02,8.51 0 top
JP4  FIDUCIAL1X2  [FIDUCIAL-1X2]  40.64,38.61 0 top
JP5  USB_SOLDER_PADS  [USB-SOLDER-PADS]  43.18,38.23 90 bottom
JP6  FIDUCIAL1X2  [FIDUCIAL-1X2]  71.88,8.51 0 top
JP7  FIDUCIAL1X2  [FIDUCIAL-1X2]  63.5,38.61 0 top
JP8  USB_SOLDER_PADS  [USB-SOLDER-PADS]  66.04,38.23 90 bottom
JP9  FIDUCIAL1X2  [FIDUCIAL-1X2]  94.74,8.51 0 top
JP10  FIDUCIAL1X2  [FIDUCIAL-1X2]  86.36,38.61 0 top
JP11  USB_SOLDER_PADS  [USB-SOLDER-PADS]  88.9,38.23 90 bottom
JP12  FIDUCIAL1X2  [FIDUCIAL-1X2]  117.6,8.51 0 top
JP13  FIDUCIAL1X2  [FIDUCIAL-1X2]  109.22,38.61 0 top
JP14  USB_SOLDER_PADS  [USB-SOLDER-PADS]  20.32,38.23 90 bottom
JP15  USB_SOLDER_PADS  [USB-SOLDER-PADS]  111.76,38.23 90 bottom
JP16  FIDUCIAL1X2  [FIDUCIAL-1X2]  140.46,8.51 0 top
JP17  FIDUCIAL1X2  [FIDUCIAL-1X2]  132.08,38.61 0 top
JP18  USB_SOLDER_PADS  [USB-SOLDER-PADS]  134.62,38.23 90 bottom
JP19  FIDUCIAL1X2  [FIDUCIAL-1X2]  163.32,8.51 0 top
JP20  FIDUCIAL1X2  [FIDUCIAL-1X2]  154.94,38.61 0 top
JP21  USB_SOLDER_PADS  [USB-SOLDER-PADS]  157.48,38.23 90 bottom
JP22  FIDUCIAL1X2  [FIDUCIAL-1X2]  186.18,8.51 0 top
JP23  FIDUCIAL1X2  [FIDUCIAL-1X2]  177.8,38.61 0 top
JP24  USB_SOLDER_PADS  [USB-SOLDER-PADS]  180.34,38.23 90 bottom
JP25  FIDUCIAL1X2  [FIDUCIAL-1X2]  26.16,47.88 0 top
JP26  FIDUCIAL1X2  [FIDUCIAL-1X2]  17.78,77.98 0 top
JP27  USB_SOLDER_PADS  [USB-SOLDER-PADS]  20.32,77.6 90 bottom
JP28  FIDUCIAL1X2  [FIDUCIAL-1X2]  49.02,47.88 0 top
JP29  FIDUCIAL1X2  [FIDUCIAL-1X2]  40.64,77.98 0 top
JP30  USB_SOLDER_PADS  [USB-SOLDER-PADS]  43.18,77.6 90 bottom
JP31  FIDUCIAL1X2  [FIDUCIAL-1X2]  71.88,47.88 0 top
JP32  FIDUCIAL1X2  [FIDUCIAL-1X2]  63.5,77.98 0 top
JP33  USB_SOLDER_PADS  [USB-SOLDER-PADS]  66.04,77.6 90 bottom
JP34  FIDUCIAL1X2  [FIDUCIAL-1X2]  94.74,47.88 0 top
JP35  FIDUCIAL1X2  [FIDUCIAL-1X2]  86.36,77.98 0 top
JP36  USB_SOLDER_PADS  [USB-SOLDER-PADS]  88.9,77.6 90 bottom
JP37  FIDUCIAL1X2  [FIDUCIAL-1X2]  117.6,47.88 0 top
JP38  FIDUCIAL1X2  [FIDUCIAL-1X2]  109.22,77.98 0 top
JP39  USB_SOLDER_PADS  [USB-SOLDER-PADS]  111.76,77.6 90 bottom
JP40  FIDUCIAL1X2  [FIDUCIAL-1X2]  140.46,47.88 0 top
JP41  FIDUCIAL1X2  [FIDUCIAL-1X2]  132.08,77.98 0 top
JP42  USB_SOLDER_PADS  [USB-SOLDER-PADS]  134.62,77.6 90 bottom
JP43  FIDUCIAL1X2  [FIDUCIAL-1X2]  163.32,47.88 0 top
JP44  FIDUCIAL1X2  [FIDUCIAL-1X2]  154.94,77.98 0 top
JP45  USB_SOLDER_PADS  [USB-SOLDER-PADS]  157.48,77.6 90 bottom
JP46  FIDUCIAL1X2  [FIDUCIAL-1X2]  186.18,47.88 0 top
JP47  FIDUCIAL1X2  [FIDUCIAL-1X2]  177.8,77.98 0 top
JP48  USB_SOLDER_PADS  [USB-SOLDER-PADS]  180.34,77.6 90 bottom
JP49  FIDUCIAL1X2  [FIDUCIAL-1X2]  26.16,87.25 0 top
JP50  FIDUCIAL1X2  [FIDUCIAL-1X2]  17.78,117.35 0 top
JP51  USB_SOLDER_PADS  [USB-SOLDER-PADS]  20.32,116.97 90 bottom
JP52  FIDUCIAL1X2  [FIDUCIAL-1X2]  49.02,87.25 0 top
JP53  FIDUCIAL1X2  [FIDUCIAL-1X2]  40.64,117.35 0 top
JP54  USB_SOLDER_PADS  [USB-SOLDER-PADS]  43.18,116.97 90 bottom
JP55  FIDUCIAL1X2  [FIDUCIAL-1X2]  71.88,87.25 0 top
JP56  FIDUCIAL1X2  [FIDUCIAL-1X2]  63.5,117.35 0 top
JP57  USB_SOLDER_PADS  [USB-SOLDER-PADS]  66.04,116.97 90 bottom
JP58  FIDUCIAL1X2  [FIDUCIAL-1X2]  94.74,87.25 0 top
JP59  FIDUCIAL1X2  [FIDUCIAL-1X2]  86.36,117.35 0 top
JP60  USB_SOLDER_PADS  [USB-SOLDER-PADS]  88.9,116.97 90 bottom
JP61  FIDUCIAL1X2  [FIDUCIAL-1X2]  117.6,87.25 0 top
JP62  FIDUCIAL1X2  [FIDUCIAL-1X2]  109.22,117.35 0 top
JP63  USB_SOLDER_PADS  [USB-SOLDER-PADS]  111.76,116.97 90 bottom
JP64  FIDUCIAL1X2  [FIDUCIAL-1X2]  140.46,87.25 0 top
JP65  FIDUCIAL1X2  [FIDUCIAL-1X2]  132.08,117.35 0 top
JP66  USB_SOLDER_PADS  [USB-SOLDER-PADS]  134.62,116.97 90 bottom
JP67  FIDUCIAL1X2  [FIDUCIAL-1X2]  163.32,87.25 0 top
JP68  FIDUCIAL1X2  [FIDUCIAL-1X2]  154.94,117.35 0 top
JP69  USB_SOLDER_PADS  [USB-SOLDER-PADS]  157.48,116.97 90 bottom
JP70  FIDUCIAL1X2  [FIDUCIAL-1X2]  186.18,87.25 0 top
JP71  FIDUCIAL1X2  [FIDUCIAL-1X2]  177.8,117.35 0 top
JP72  USB_SOLDER_PADS  [USB-SOLDER-PADS]  180.34,116.97 90 bottom
LED1  RED  [LED-0603]  13.33,38.1 0 top
LED2  RED  [LED-0603]  36.2,38.1 0 top
LED3  RED  [LED-0603]  59.05,38.1 0 top
LED4  RED  [LED-0603]  81.91,38.1 0 top
LED5  RED  [LED-0603]  104.78,38.1 0 top
LED6  RED  [LED-0603]  127.63,38.1 0 top
LED7  RED  [LED-0603]  150.5,38.1 0 top
LED8  RED  [LED-0603]  173.36,38.1 0 top
LED9  RED  [LED-0603]  13.33,77.47 0 top
LED10  RED  [LED-0603]  36.2,77.47 0 top
LED11  RED  [LED-0603]  59.05,77.47 0 top
LED12  RED  [LED-0603]  81.91,77.47 0 top
LED13  RED  [LED-0603]  104.78,77.47 0 top
LED14  RED  [LED-0603]  127.63,77.47 0 top
LED15  RED  [LED-0603]  150.5,77.47 0 top
LED16  RED  [LED-0603]  173.36,77.47 0 top
LED17  RED  [LED-0603]  13.33,116.84 0 top
LED18  RED  [LED-0603]  36.2,116.84 0 top
LED19  RED  [LED-0603]  59.05,116.84 0 top
LED20  RED  [LED-0603]  81.91,116.84 0 top
LED21  RED  [LED-0603]  104.78,116.84 0 top
LED22  RED  [LED-0603]  127.63,116.84 0 top
LED23  RED  [LED-0603]  150.5,116.84 0 top
LED24  RED  [LED-0603]  173.36,116.84 0 top
LOGO1  SFE_LOGO_NAME_FLAME.1_INCH  [SFE_LOGO_NAME_FLAME_.1]  19.05,23.37 270 bottom
LOGO2  SFE_LOGO_NAME_FLAME.1_INCH  [SFE_LOGO_NAME_FLAME_.1]  41.91,23.37 270 bottom
LOGO3  QWIIC_LOGO_6MM  [QWIIC_6MM]  20.32,8.13 0 bottom
LOGO4  SFE_LOGO_FLAME.1_INCH  [SFE_LOGO_FLAME_.1]  16,24 0 top
LOGO5  QWIIC_LOGO_6MM  [QWIIC_6MM]  43.18,8.13 0 bottom
LOGO6  SFE_LOGO_FLAME.1_INCH  [SFE_LOGO_FLAME_.1]  38.86,24 0 top
LOGO7  SFE_LOGO_NAME_FLAME.1_INCH  [SFE_LOGO_NAME_FLAME_.1]  64.77,23.37 270 bottom
LOGO8  QWIIC_LOGO_6MM  [QWIIC_6MM]  66.04,8.13 0 bottom
LOGO9  SFE_LOGO_FLAME.1_INCH  [SFE_LOGO_FLAME_.1]  61.72,24 0 top
LOGO10  SFE_LOGO_NAME_FLAME.1_INCH  [SFE_LOGO_NAME_FLAME_.1]  87.63,23.37 270 bottom
LOGO11  QWIIC_LOGO_6MM  [QWIIC_6MM]  88.9,8.13 0 bottom
LOGO12  SFE_LOGO_FLAME.1_INCH  [SFE_LOGO_FLAME_.1]  84.58,24 0 top
LOGO13  SFE_LOGO_NAME_FLAME.1_INCH  [SFE_LOGO_NAME_FLAME_.1]  110.49,23.37 270 bottom
LOGO14  QWIIC_LOGO_6MM  [QWIIC_6MM]  111.76,8.13 0 bottom
LOGO15  SFE_LOGO_FLAME.1_INCH  [SFE_LOGO_FLAME_.1]  107.44,24 0 top
LOGO16  SFE_LOGO_NAME_FLAME.1_INCH  [SFE_LOGO_NAME_FLAME_.1]  133.35,23.37 270 bottom
LOGO17  QWIIC_LOGO_6MM  [QWIIC_6MM]  134.62,8.13 0 bottom
LOGO18  SFE_LOGO_FLAME.1_INCH  [SFE_LOGO_FLAME_.1]  130.3,24 0 top
LOGO19  SFE_LOGO_NAME_FLAME.1_INCH  [SFE_LOGO_NAME_FLAME_.1]  156.21,23.37 270 bottom
LOGO20  QWIIC_LOGO_6MM  [QWIIC_6MM]  157.48,8.13 0 bottom
LOGO21  SFE_LOGO_FLAME.1_INCH  [SFE_LOGO_FLAME_.1]  153.16,24 0 top
LOGO22  SFE_LOGO_NAME_FLAME.1_INCH  [SFE_LOGO_NAME_FLAME_.1]  179.07,23.37 270 bottom
LOGO23  QWIIC_LOGO_6MM  [QWIIC_6MM]  180.34,8.13 0 bottom
LOGO24  SFE_LOGO_FLAME.1_INCH  [SFE_LOGO_FLAME_.1]  176.02,24 0 top
LOGO25  SFE_LOGO_NAME_FLAME.1_INCH  [SFE_LOGO_NAME_FLAME_.1]  19.05,62.74 270 bottom
LOGO26  QWIIC_LOGO_6MM  [QWIIC_6MM]  20.32,47.5 0 bottom
LOGO27  SFE_LOGO_FLAME.1_INCH  [SFE_LOGO_FLAME_.1]  16,63.37 0 top
LOGO28  SFE_LOGO_NAME_FLAME.1_INCH  [SFE_LOGO_NAME_FLAME_.1]  41.91,62.74 270 bottom
LOGO29  QWIIC_LOGO_6MM  [QWIIC_6MM]  43.18,47.5 0 bottom
LOGO30  SFE_LOGO_FLAME.1_INCH  [SFE_LOGO_FLAME_.1]  38.86,63.37 0 top
LOGO31  SFE_LOGO_NAME_FLAME.1_INCH  [SFE_LOGO_NAME_FLAME_.1]  64.77,62.74 270 bottom
LOGO32  QWIIC_LOGO_6MM  [QWIIC_6MM]  66.04,47.5 0 bottom
LOGO33  SFE_LOGO_FLAME.1_INCH  [SFE_LOGO_FLAME_.1]  61.72,63.37 0 top
LOGO34  SFE_LOGO_NAME_FLAME.1_INCH  [SFE_LOGO_NAME_FLAME_.1]  87.63,62.74 270 bottom
LOGO35  QWIIC_LOGO_6MM  [QWIIC_6MM]  88.9,47.5 0 bottom
LOGO36  SFE_LOGO_FLAME.1_INCH  [SFE_LOGO_FLAME_.1]  84.58,63.37 0 top
LOGO37  SFE_LOGO_NAME_FLAME.1_INCH  [SFE_LOGO_NAME_FLAME_.1]  110.49,62.74 270 bottom
LOGO38  QWIIC_LOGO_6MM  [QWIIC_6MM]  111.76,47.5 0 bottom
LOGO39  SFE_LOGO_FLAME.1_INCH  [SFE_LOGO_FLAME_.1]  107.44,63.37 0 top
LOGO40  SFE_LOGO_NAME_FLAME.1_INCH  [SFE_LOGO_NAME_FLAME_.1]  133.35,62.74 270 bottom
LOGO41  QWIIC_LOGO_6MM  [QWIIC_6MM]  134.62,47.5 0 bottom
LOGO42  SFE_LOGO_FLAME.1_INCH  [SFE_LOGO_FLAME_.1]  130.3,63.37 0 top
LOGO43  SFE_LOGO_NAME_FLAME.1_INCH  [SFE_LOGO_NAME_FLAME_.1]  156.21,62.74 270 bottom
LOGO44  QWIIC_LOGO_6MM  [QWIIC_6MM]  157.48,47.5 0 bottom
LOGO45  SFE_LOGO_FLAME.1_INCH  [SFE_LOGO_FLAME_.1]  153.16,63.37 0 top
LOGO46  SFE_LOGO_NAME_FLAME.1_INCH  [SFE_LOGO_NAME_FLAME_.1]  179.07,62.74 270 bottom
LOGO47  QWIIC_LOGO_6MM  [QWIIC_6MM]  180.34,47.5 0 bottom
LOGO48  SFE_LOGO_FLAME.1_INCH  [SFE_LOGO_FLAME_.1]  176.02,63.37 0 top
LOGO49  SFE_LOGO_NAME_FLAME.1_INCH  [SFE_LOGO_NAME_FLAME_.1]  19.05,102.11 270 bottom
LOGO50  QWIIC_LOGO_6MM  [QWIIC_6MM]  20.32,86.87 0 bottom
LOGO51  SFE_LOGO_FLAME.1_INCH  [SFE_LOGO_FLAME_.1]  16,102.74 0 top
LOGO52  SFE_LOGO_NAME_FLAME.1_INCH  [SFE_LOGO_NAME_FLAME_.1]  41.91,102.11 270 bottom
LOGO53  QWIIC_LOGO_6MM  [QWIIC_6MM]  43.18,86.87 0 bottom
LOGO54  SFE_LOGO_FLAME.1_INCH  [SFE_LOGO_FLAME_.1]  38.86,102.74 0 top
LOGO55  SFE_LOGO_NAME_FLAME.1_INCH  [SFE_LOGO_NAME_FLAME_.1]  64.77,102.11 270 bottom
LOGO56  QWIIC_LOGO_6MM  [QWIIC_6MM]  66.04,86.87 0 bottom
LOGO57  SFE_LOGO_FLAME.1_INCH  [SFE_LOGO_FLAME_.1]  61.72,102.74 0 top
LOGO58  SFE_LOGO_NAME_FLAME.1_INCH  [SFE_LOGO_NAME_FLAME_.1]  87.63,102.11 270 bottom
LOGO59  QWIIC_LOGO_6MM  [QWIIC_6MM]  88.9,86.87 0 bottom
LOGO60  SFE_LOGO_FLAME.1_INCH  [SFE_LOGO_FLAME_.1]  84.58,102.74 0 top
LOGO61  SFE_LOGO_NAME_FLAME.1_INCH  [SFE_LOGO_NAME_FLAME_.1]  110.49,102.11 270 bottom
LOGO62  QWIIC_LOGO_6MM  [QWIIC_6MM]  111.76,86.87 0 bottom
LOGO63  SFE_LOGO_FLAME.1_INCH  [SFE_LOGO_FLAME_.1]  107.44,102.74 0 top
LOGO64  SFE_LOGO_NAME_FLAME.1_INCH  [SFE_LOGO_NAME_FLAME_.1]  133.35,102.11 270 bottom
LOGO65  QWIIC_LOGO_6MM  [QWIIC_6MM]  134.62,86.87 0 bottom
LOGO66  SFE_LOGO_FLAME.1_INCH  [SFE_LOGO_FLAME_.1]  130.3,102.74 0 top
LOGO67  SFE_LOGO_NAME_FLAME.1_INCH  [SFE_LOGO_NAME_FLAME_.1]  156.21,102.11 270 bottom
LOGO68  QWIIC_LOGO_6MM  [QWIIC_6MM]  157.48,86.87 0 bottom
LOGO69  SFE_LOGO_FLAME.1_INCH  [SFE_LOGO_FLAME_.1]  153.16,102.74 0 top
LOGO70  SFE_LOGO_NAME_FLAME.1_INCH  [SFE_LOGO_NAME_FLAME_.1]  179.07,102.11 270 bottom
LOGO71  QWIIC_LOGO_6MM  [QWIIC_6MM]  180.34,86.87 0 bottom
LOGO72  SFE_LOGO_FLAME.1_INCH  [SFE_LOGO_FLAME_.1]  176.02,102.74 0 top
R1  5.1k  [0402-TIGHT]  15.49,36.7 270 top
R2  10k  [0402-TIGHT]  23.11,12.06 0 top
R3  5.1k  [0402-TIGHT]  25.15,36.7 270 top
R4  1k  [0402-TIGHT]  38.23,30.99 270 top
R5  2.2k  [0402-TIGHT]  23.11,13.84 0 top
R6  10k  [0402-TIGHT]  45.97,12.06 0 top
R7  2.2k  [0402-TIGHT]  23.11,12.95 0 top
R8  5.1k  [0402-TIGHT]  38.35,36.7 270 top
R9  5.1k  [0402-TIGHT]  48.01,36.7 270 top
R10  1k  [0402-TIGHT]  17.53,12.95 0 top
R11  1k  [0402-TIGHT]  15.37,30.99 270 top
R12  27  [0402-TIGHT]  25.4,32.26 270 top
R13  27  [0402-TIGHT]  24.13,32.26 270 top
R14  200  [0402-TIGHT]  25.27,25.4 270 top
R15  1k  [0402-TIGHT]  15.37,26.42 270 top
R16  10k  [0402-TIGHT]  15.37,28.45 90 top
R17  2.2k  [0402-TIGHT]  45.97,13.84 0 top
R18  2.2k  [0402-TIGHT]  45.97,12.95 0 top
R19  1k  [0402-TIGHT]  40.39,12.95 0 top
R20  27  [0402-TIGHT]  48.26,32.26 270 top
R21  27  [0402-TIGHT]  46.99,32.26 270 top
R22  200  [0402-TIGHT]  48.13,25.4 270 top
R23  1k  [0402-TIGHT]  38.23,26.42 270 top
R24  10k  [0402-TIGHT]  38.23,28.45 90 top
R25  1k  [0402-TIGHT]  61.09,30.99 270 top
R26  10k  [0402-TIGHT]  68.83,12.06 0 top
R27  5.1k  [0402-TIGHT]  61.21,36.7 270 top
R28  5.1k  [0402-TIGHT]  70.87,36.7 270 top
R29  2.2k  [0402-TIGHT]  68.83,13.84 0 top
R30  2.2k  [0402-TIGHT]  68.83,12.95 0 top
R31  1k  [0402-TIGHT]  63.25,12.95 0 top
R32  27  [0402-TIGHT]  71.12,32.26 270 top
R33  27  [0402-TIGHT]  69.85,32.26 270 top
R34  200  [0402-TIGHT]  70.99,25.4 270 top
R35  1k  [0402-TIGHT]  61.09,26.42 270 top
R36  10k  [0402-TIGHT]  61.09,28.45 90 top
R37  1k  [0402-TIGHT]  83.95,30.99 270 top
R38  10k  [0402-TIGHT]  91.69,12.06 0 top
R39  5.1k  [0402-TIGHT]  84.07,36.7 270 top
R40  5.1k  [0402-TIGHT]  93.73,36.7 270 top
R41  2.2k  [0402-TIGHT]  91.69,13.84 0 top
R42  2.2k  [0402-TIGHT]  91.69,12.95 0 top
R43  1k  [0402-TIGHT]  86.11,12.95 0 top
R44  27  [0402-TIGHT]  93.98,32.26 270 top
R45  27  [0402-TIGHT]  92.71,32.26 270 top
R46  200  [0402-TIGHT]  93.85,25.4 270 top
R47  1k  [0402-TIGHT]  83.95,26.42 270 top
R48  10k  [0402-TIGHT]  83.95,28.45 90 top
R49  1k  [0402-TIGHT]  106.81,30.99 270 top
R50  10k  [0402-TIGHT]  114.55,12.06 0 top
R51  5.1k  [0402-TIGHT]  106.93,36.7 270 top
R52  5.1k  [0402-TIGHT]  116.59,36.7 270 top
R53  2.2k  [0402-TIGHT]  114.55,13.84 0 top
R54  2.2k  [0402-TIGHT]  114.55,12.95 0 top
R55  1k  [0402-TIGHT]  108.97,12.95 0 top
R56  27  [0402-TIGHT]  116.84,32.26 270 top
R57  27  [0402-TIGHT]  115.57,32.26 270 top
R58  200  [0402-TIGHT]  116.71,25.4 270 top
R59  1k  [0402-TIGHT]  106.81,26.42 270 top
R60  10k  [0402-TIGHT]  106.81,28.45 90 top
R61  1k  [0402-TIGHT]  129.67,30.99 270 top
R62  10k  [0402-TIGHT]  137.41,12.06 0 top
R63  5.1k  [0402-TIGHT]  129.79,36.7 270 top
R64  5.1k  [0402-TIGHT]  139.45,36.7 270 top
R65  2.2k  [0402-TIGHT]  137.41,13.84 0 top
R66  2.2k  [0402-TIGHT]  137.41,12.95 0 top
R67  1k  [0402-TIGHT]  131.83,12.95 0 top
R68  27  [0402-TIGHT]  139.7,32.26 270 top
R69  27  [0402-TIGHT]  138.43,32.26 270 top
R70  200  [0402-TIGHT]  139.57,25.4 270 top
R71  1k  [0402-TIGHT]  129.67,26.42 270 top
R72  10k  [0402-TIGHT]  129.67,28.45 90 top
R73  1k  [0402-TIGHT]  152.53,30.99 270 top
R74  10k  [0402-TIGHT]  160.27,12.06 0 top
R75  5.1k  [0402-TIGHT]  152.65,36.7 270 top
R76  5.1k  [0402-TIGHT]  162.31,36.7 270 top
R77  2.2k  [0402-TIGHT]  160.27,13.84 0 top
R78  2.2k  [0402-TIGHT]  160.27,12.95 0 top
R79  1k  [0402-TIGHT]  154.69,12.95 0 top
R80  27  [0402-TIGHT]  162.56,32.26 270 top
R81  27  [0402-TIGHT]  161.29,32.26 270 top
R82  200  [0402-TIGHT]  162.43,25.4 270 top
R83  1k  [0402-TIGHT]  152.53,26.42 270 top
R84  10k  [0402-TIGHT]  152.53,28.45 90 top
R85  1k  [0402-TIGHT]  175.39,30.99 270 top
R86  10k  [0402-TIGHT]  183.13,12.06 0 top
R87  5.1k  [0402-TIGHT]  175.51,36.7 270 top
R88  5.1k  [0402-TIGHT]  185.17,36.7 270 top
R89  2.2k  [0402-TIGHT]  183.13,13.84 0 top
R90  2.2k  [0402-TIGHT]  183.13,12.95 0 top
R91  1k  [0402-TIGHT]  177.55,12.95 0 top
R92  27  [0402-TIGHT]  185.42,32.26 270 top
R93  27  [0402-TIGHT]  184.15,32.26 270 top
R94  200  [0402-TIGHT]  185.29,25.4 270 top
R95  1k  [0402-TIGHT]  175.39,26.42 270 top
R96  10k  [0402-TIGHT]  175.39,28.45 90 top
R97  1k  [0402-TIGHT]  15.37,70.36 270 top
R98  10k  [0402-TIGHT]  23.11,51.43 0 top
R99  5.1k  [0402-TIGHT]  15.49,76.07 270 top
R100  5.1k  [0402-TIGHT]  25.15,76.07 270 top
R101  2.2k  [0402-TIGHT]  23.11,53.21 0 top
R102  2.2k  [0402-TIGHT]  23.11,52.32 0 top
R103  1k  [0402-TIGHT]  17.53,52.32 0 top
R104  27  [0402-TIGHT]  25.4,71.63 270 top
R105  27  [0402-TIGHT]  24.13,71.63 270 top
R106  200  [0402-TIGHT]  25.27,64.77 270 top
R107  1k  [0402-TIGHT]  15.37,65.79 270 top
R108  10k  [0402-TIGHT]  15.37,67.82 90 top
R109  1k  [0402-TIGHT]  38.23,70.36 270 top
R110  10k  [0402-TIGHT]  45.97,51.43 0 top
R111  5.1k  [0402-TIGHT]  38.35,76.07 270 top
R112  5.1k  [0402-TIGHT]  48.01,76.07 270 top
R113  2.2k  [0402-TIGHT]  45.97,53.21 0 top
R114  2.2k  [0402-TIGHT]  45.97,52.32 0 top
R115  1k  [0402-TIGHT]  40.39,52.32 0 top
R116  27  [0402-TIGHT]  48.26,71.63 270 top
R117  27  [0402-TIGHT]  46.99,71.63 270 top
R118  200  [0402-TIGHT]  48.13,64.77 270 top
R119  1k  [0402-TIGHT]  38.23,65.79 270 top
R120  10k  [0402-TIGHT]  38.23,67.82 90 top
R121  1k  [0402-TIGHT]  61.09,70.36 270 top
R122  10k  [0402-TIGHT]  68.83,51.43 0 top
R123  5.1k  [0402-TIGHT]  61.21,76.07 270 top
R124  5.1k  [0402-TIGHT]  70.87,76.07 270 top
R125  2.2k  [0402-TIGHT]  68.83,53.21 0 top
R126  2.2k  [0402-TIGHT]  68.83,52.32 0 top
R127  1k  [0402-TIGHT]  63.25,52.32 0 top
R128  27  [0402-TIGHT]  71.12,71.63 270 top
R129  27  [0402-TIGHT]  69.85,71.63 270 top
R130  200  [0402-TIGHT]  70.99,64.77 270 top
R131  1k  [0402-TIGHT]  61.09,65.79 270 top
R132  10k  [0402-TIGHT]  61.09,67.82 90 top
R133  1k  [0402-TIGHT]  83.95,70.36 270 top
R134  10k  [0402-TIGHT]  91.69,51.43 0 top
R135  5.1k  [0402-TIGHT]  84.07,76.07 270 top
R136  5.1k  [0402-TIGHT]  93.73,76.07 270 top
R137  2.2k  [0402-TIGHT]  91.69,53.21 0 top
R138  2.2k  [0402-TIGHT]  91.69,52.32 0 top
R139  1k  [0402-TIGHT]  86.11,52.32 0 top
R140  27  [0402-TIGHT]  93.98,71.63 270 top
R141  27  [0402-TIGHT]  92.71,71.63 270 top
R142  200  [0402-TIGHT]  93.85,64.77 270 top
R143  1k  [0402-TIGHT]  83.95,65.79 270 top
R144  10k  [0402-TIGHT]  83.95,67.82 90 top
R145  1k  [0402-TIGHT]  106.81,70.36 270 top
R146  10k  [0402-TIGHT]  114.55,51.43 0 top
R147  5.1k  [0402-TIGHT]  106.93,76.07 270 top
R148  5.1k  [0402-TIGHT]  116.59,76.07 270 top
R149  2.2k  [0402-TIGHT]  114.55,53.21 0 top
R150  2.2k  [0402-TIGHT]  114.55,52.32 0 top
R151  1k  [0402-TIGHT]  108.97,52.32 0 top
R152  27  [0402-TIGHT]  116.84,71.63 270 top
R153  27  [0402-TIGHT]  115.57,71.63 270 top
R154  200  [0402-TIGHT]  116.71,64.77 270 top
R155  1k  [0402-TIGHT]  106.81,65.79 270 top
R156  10k  [0402-TIGHT]  106.81,67.82 90 top
R157  1k  [0402-TIGHT]  129.67,70.36 270 top
R158  10k  [0402-TIGHT]  137.41,51.43 0 top
R159  5.1k  [0402-TIGHT]  129.79,76.07 270 top
R160  5.1k  [0402-TIGHT]  139.45,76.07 270 top
R161  2.2k  [0402-TIGHT]  137.41,53.21 0 top
R162  2.2k  [0402-TIGHT]  137.41,52.32 0 top
R163  1k  [0402-TIGHT]  131.83,52.32 0 top
R164  27  [0402-TIGHT]  139.7,71.63 270 top
R165  27  [0402-TIGHT]  138.43,71.63 270 top
R166  200  [0402-TIGHT]  139.57,64.77 270 top
R167  1k  [0402-TIGHT]  129.67,65.79 270 top
R168  10k  [0402-TIGHT]  129.67,67.82 90 top
R169  1k  [0402-TIGHT]  152.53,70.36 270 top
R170  10k  [0402-TIGHT]  160.27,51.43 0 top
R171  5.1k  [0402-TIGHT]  152.65,76.07 270 top
R172  5.1k  [0402-TIGHT]  162.31,76.07 270 top
R173  2.2k  [0402-TIGHT]  160.27,53.21 0 top
R174  2.2k  [0402-TIGHT]  160.27,52.32 0 top
R175  1k  [0402-TIGHT]  154.69,52.32 0 top
R176  27  [0402-TIGHT]  162.56,71.63 270 top
R177  27  [0402-TIGHT]  161.29,71.63 270 top
R178  200  [0402-TIGHT]  162.43,64.77 270 top
R179  1k  [0402-TIGHT]  152.53,65.79 270 top
R180  10k  [0402-TIGHT]  152.53,67.82 90 top
R181  1k  [0402-TIGHT]  175.39,70.36 270 top
R182  10k  [0402-TIGHT]  183.13,51.43 0 top
R183  5.1k  [0402-TIGHT]  175.51,76.07 270 top
R184  5.1k  [0402-TIGHT]  185.17,76.07 270 top
R185  2.2k  [0402-TIGHT]  183.13,53.21 0 top